# Altium PCB AGC test.PcbDoc
Units mm, origin at the board's own origin, x right, y up, seen from the top; angles counter-clockwise.
Board outline 60 x 60 mm, 4 copper layers (Top Layer, Layer 1, Layer 2, Bottom Layer), stack 1.501 mm thick; 51 components, 29 nets, 145 pads, 304 vias.
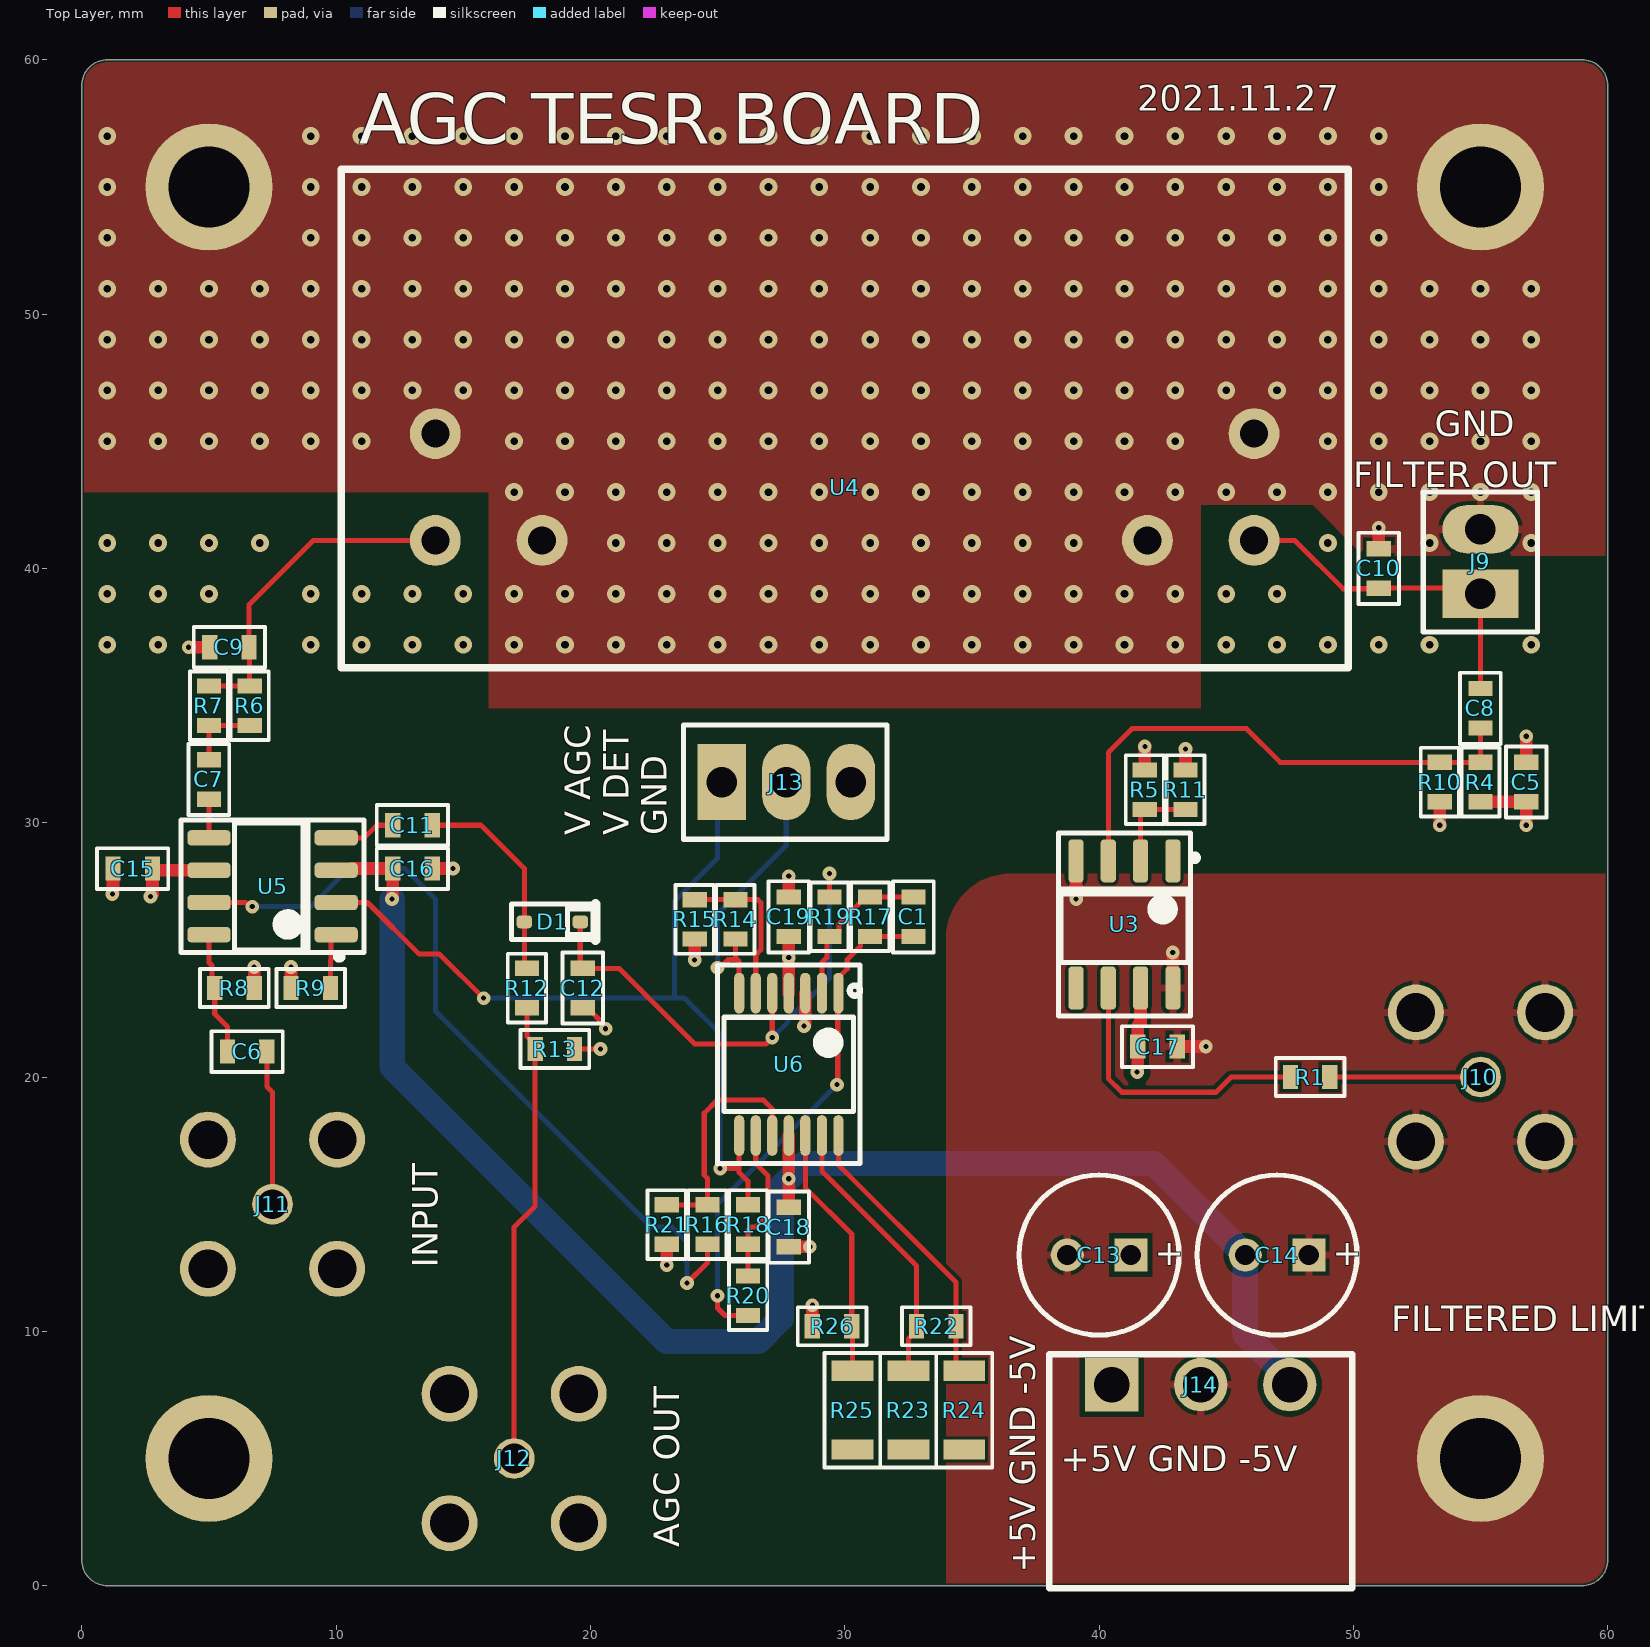
[diagram p0: Top Layer view]
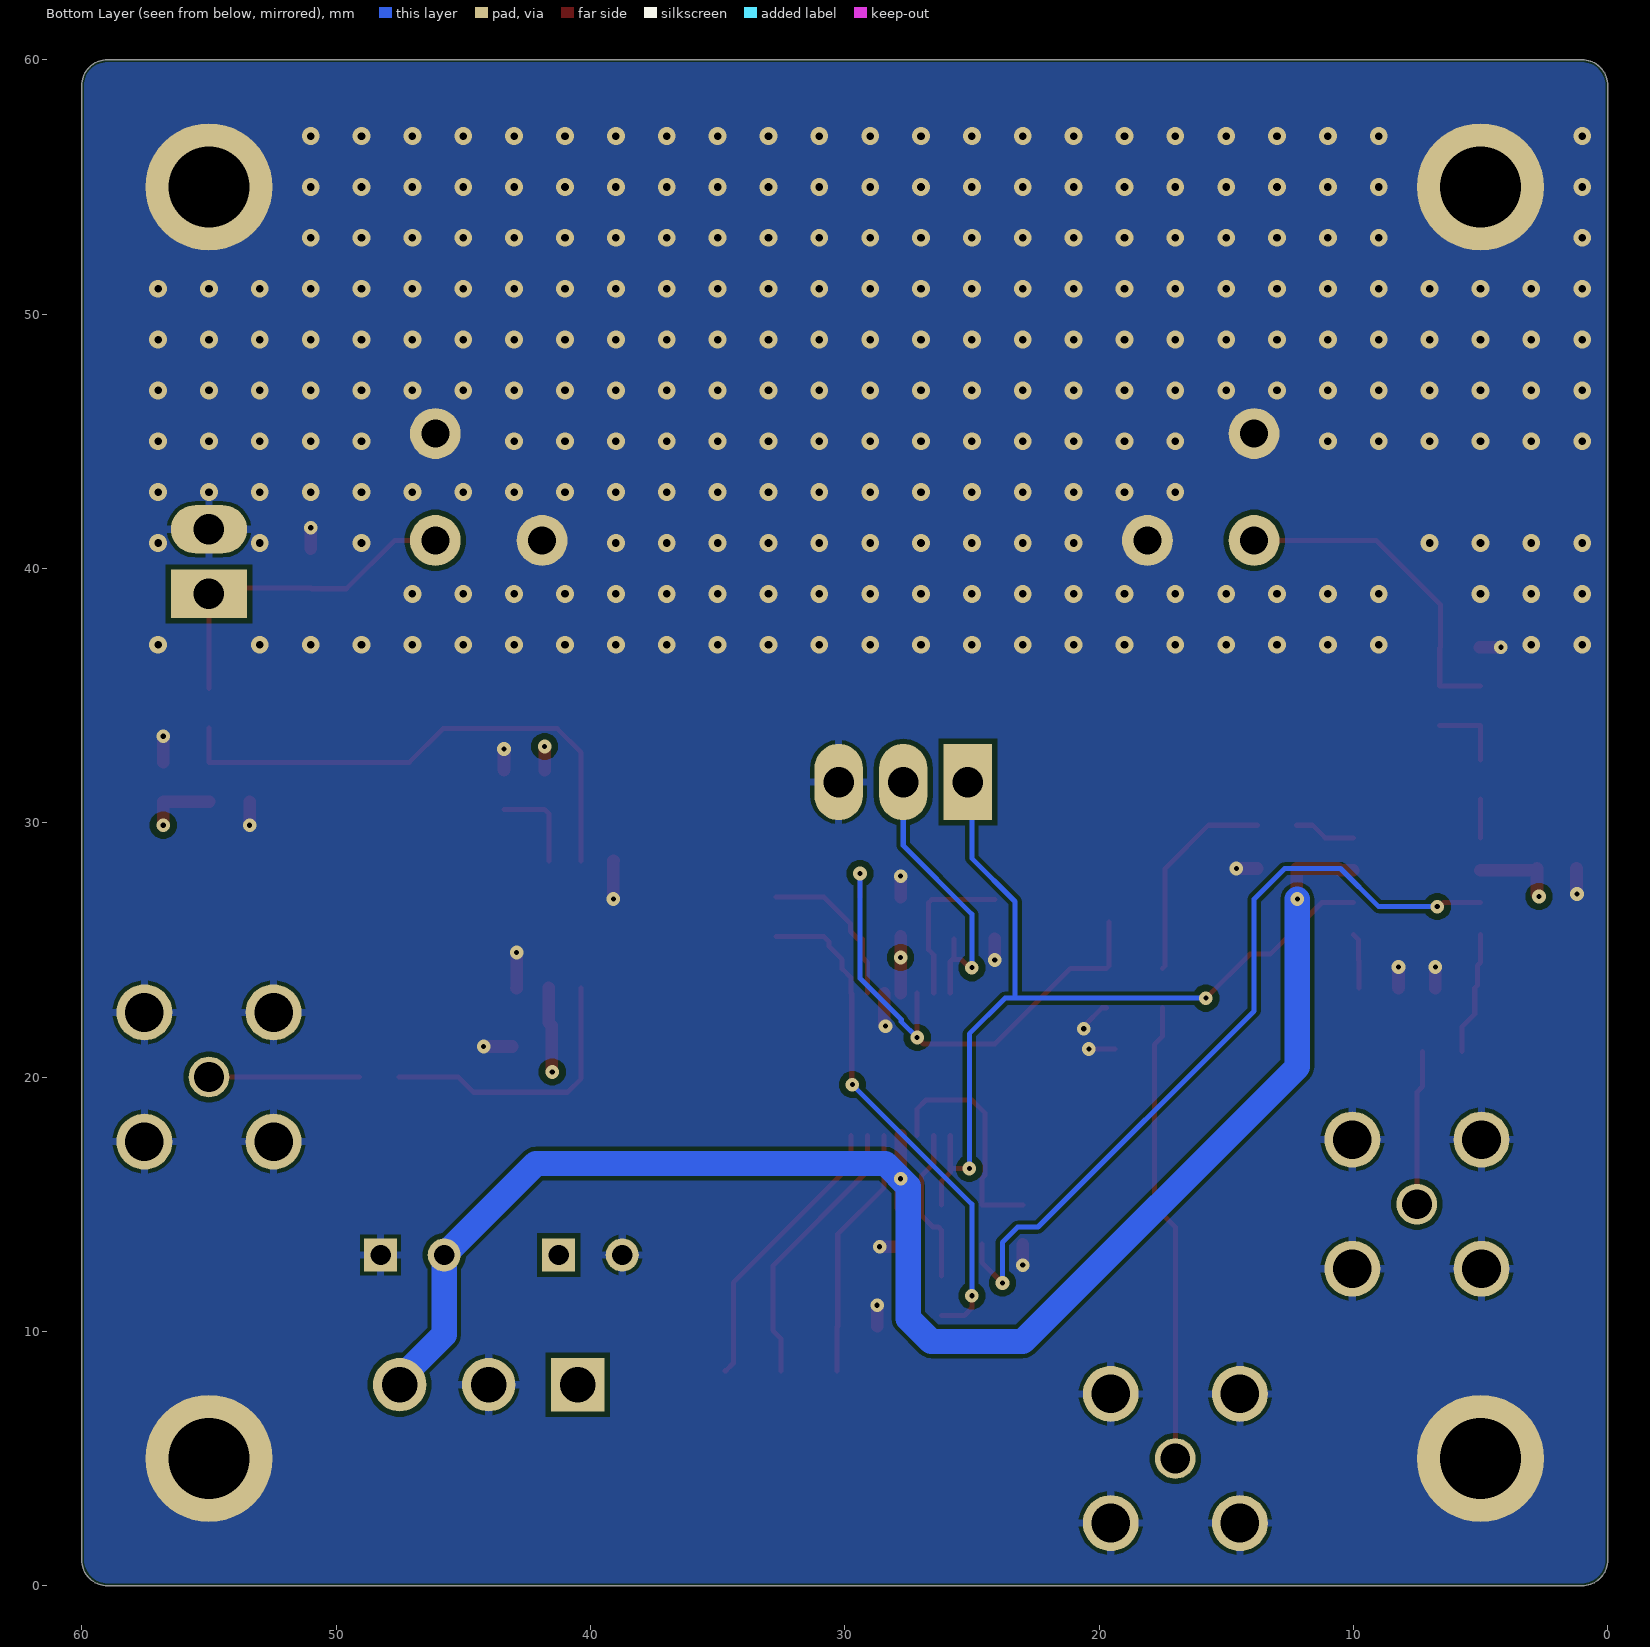
[diagram p1: Bottom Layer view, seen from below]
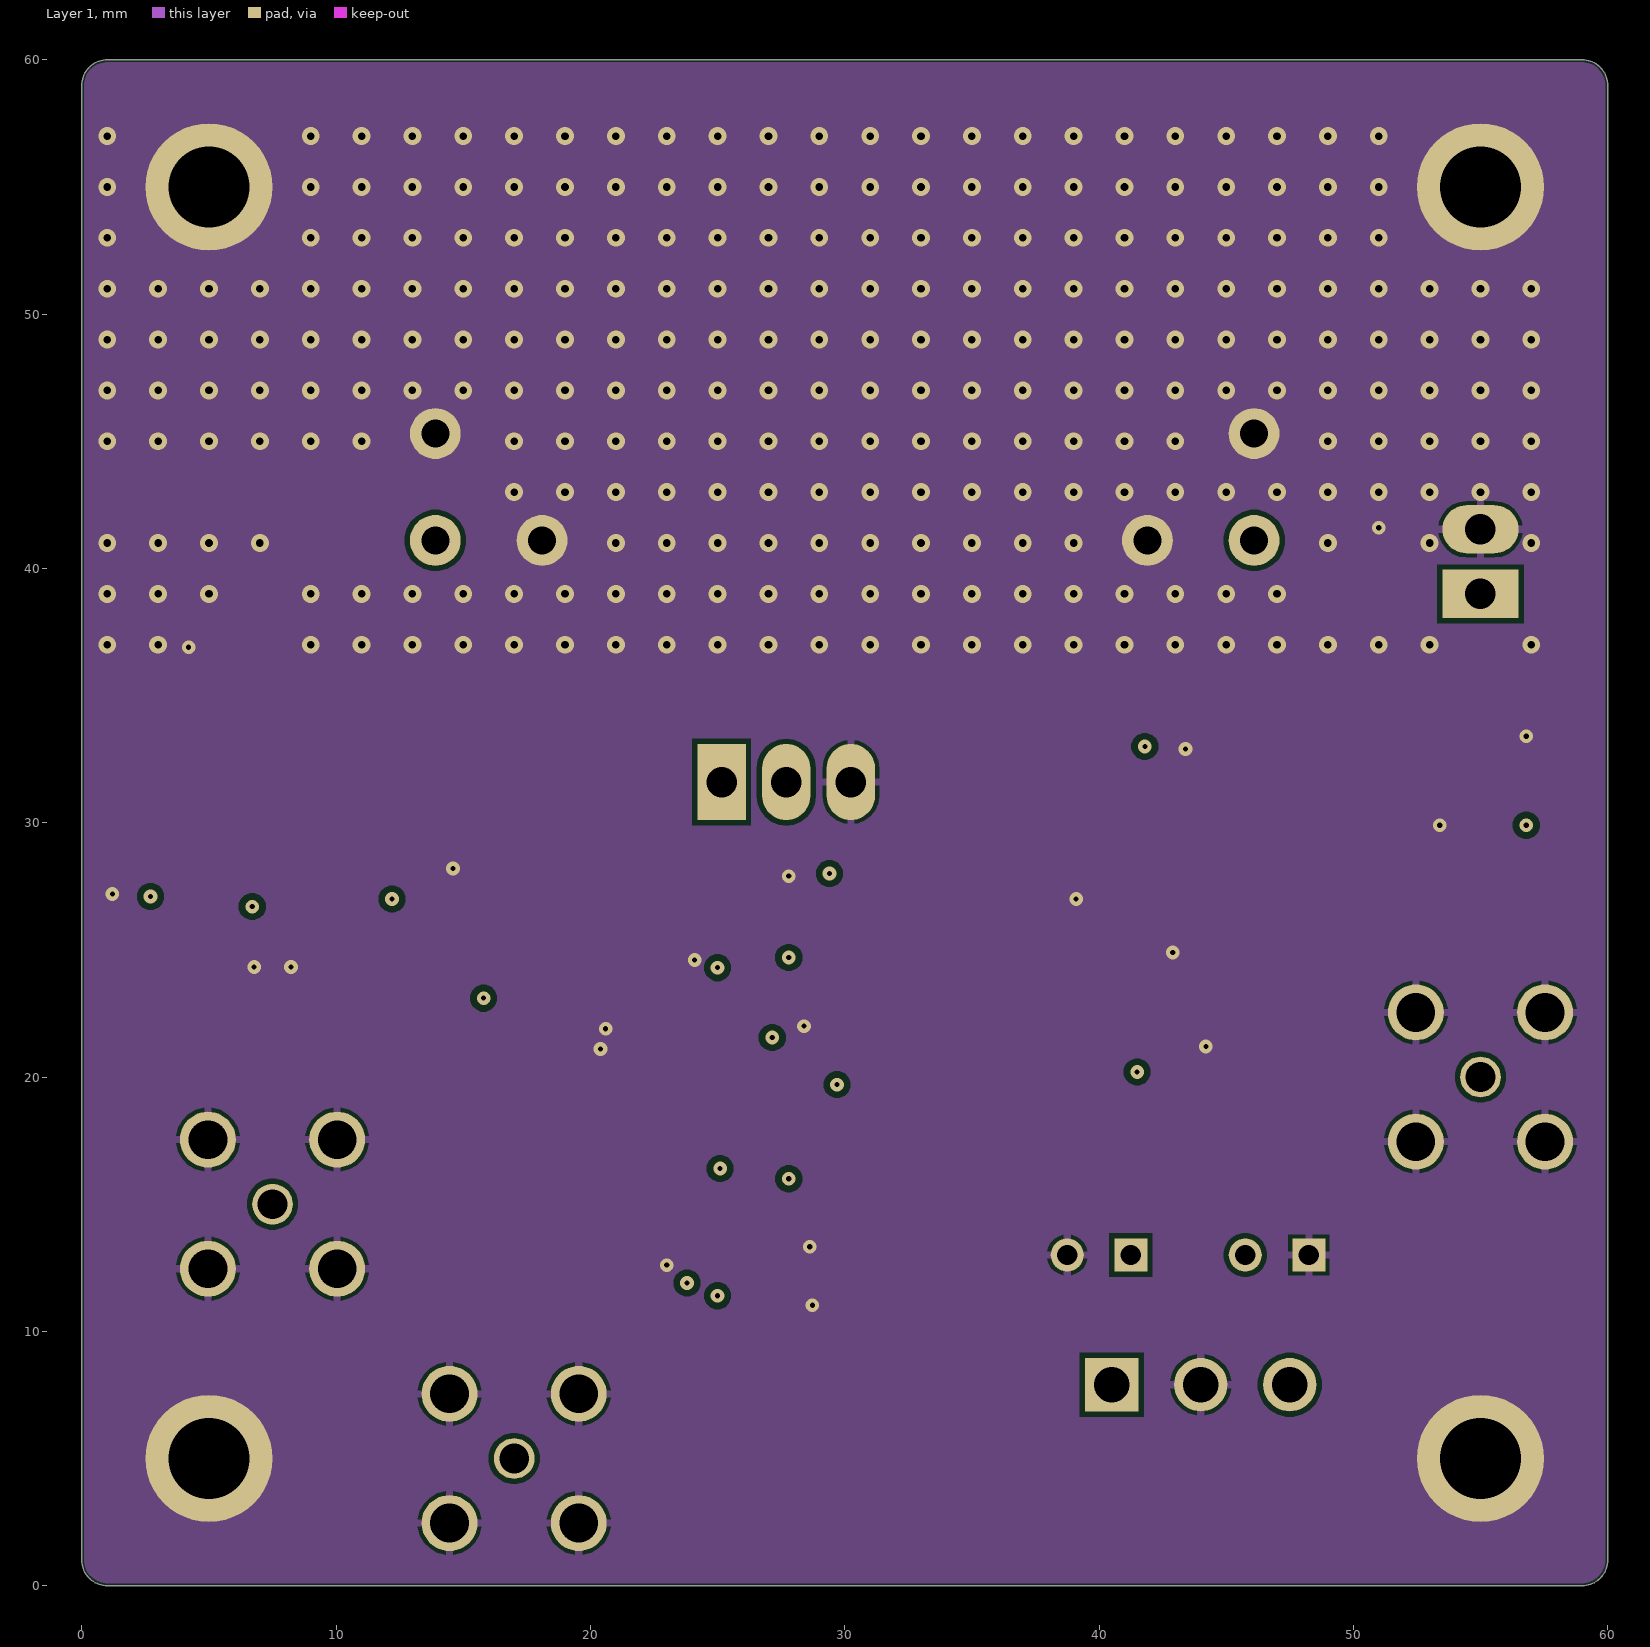
[diagram p2: Layer 1]
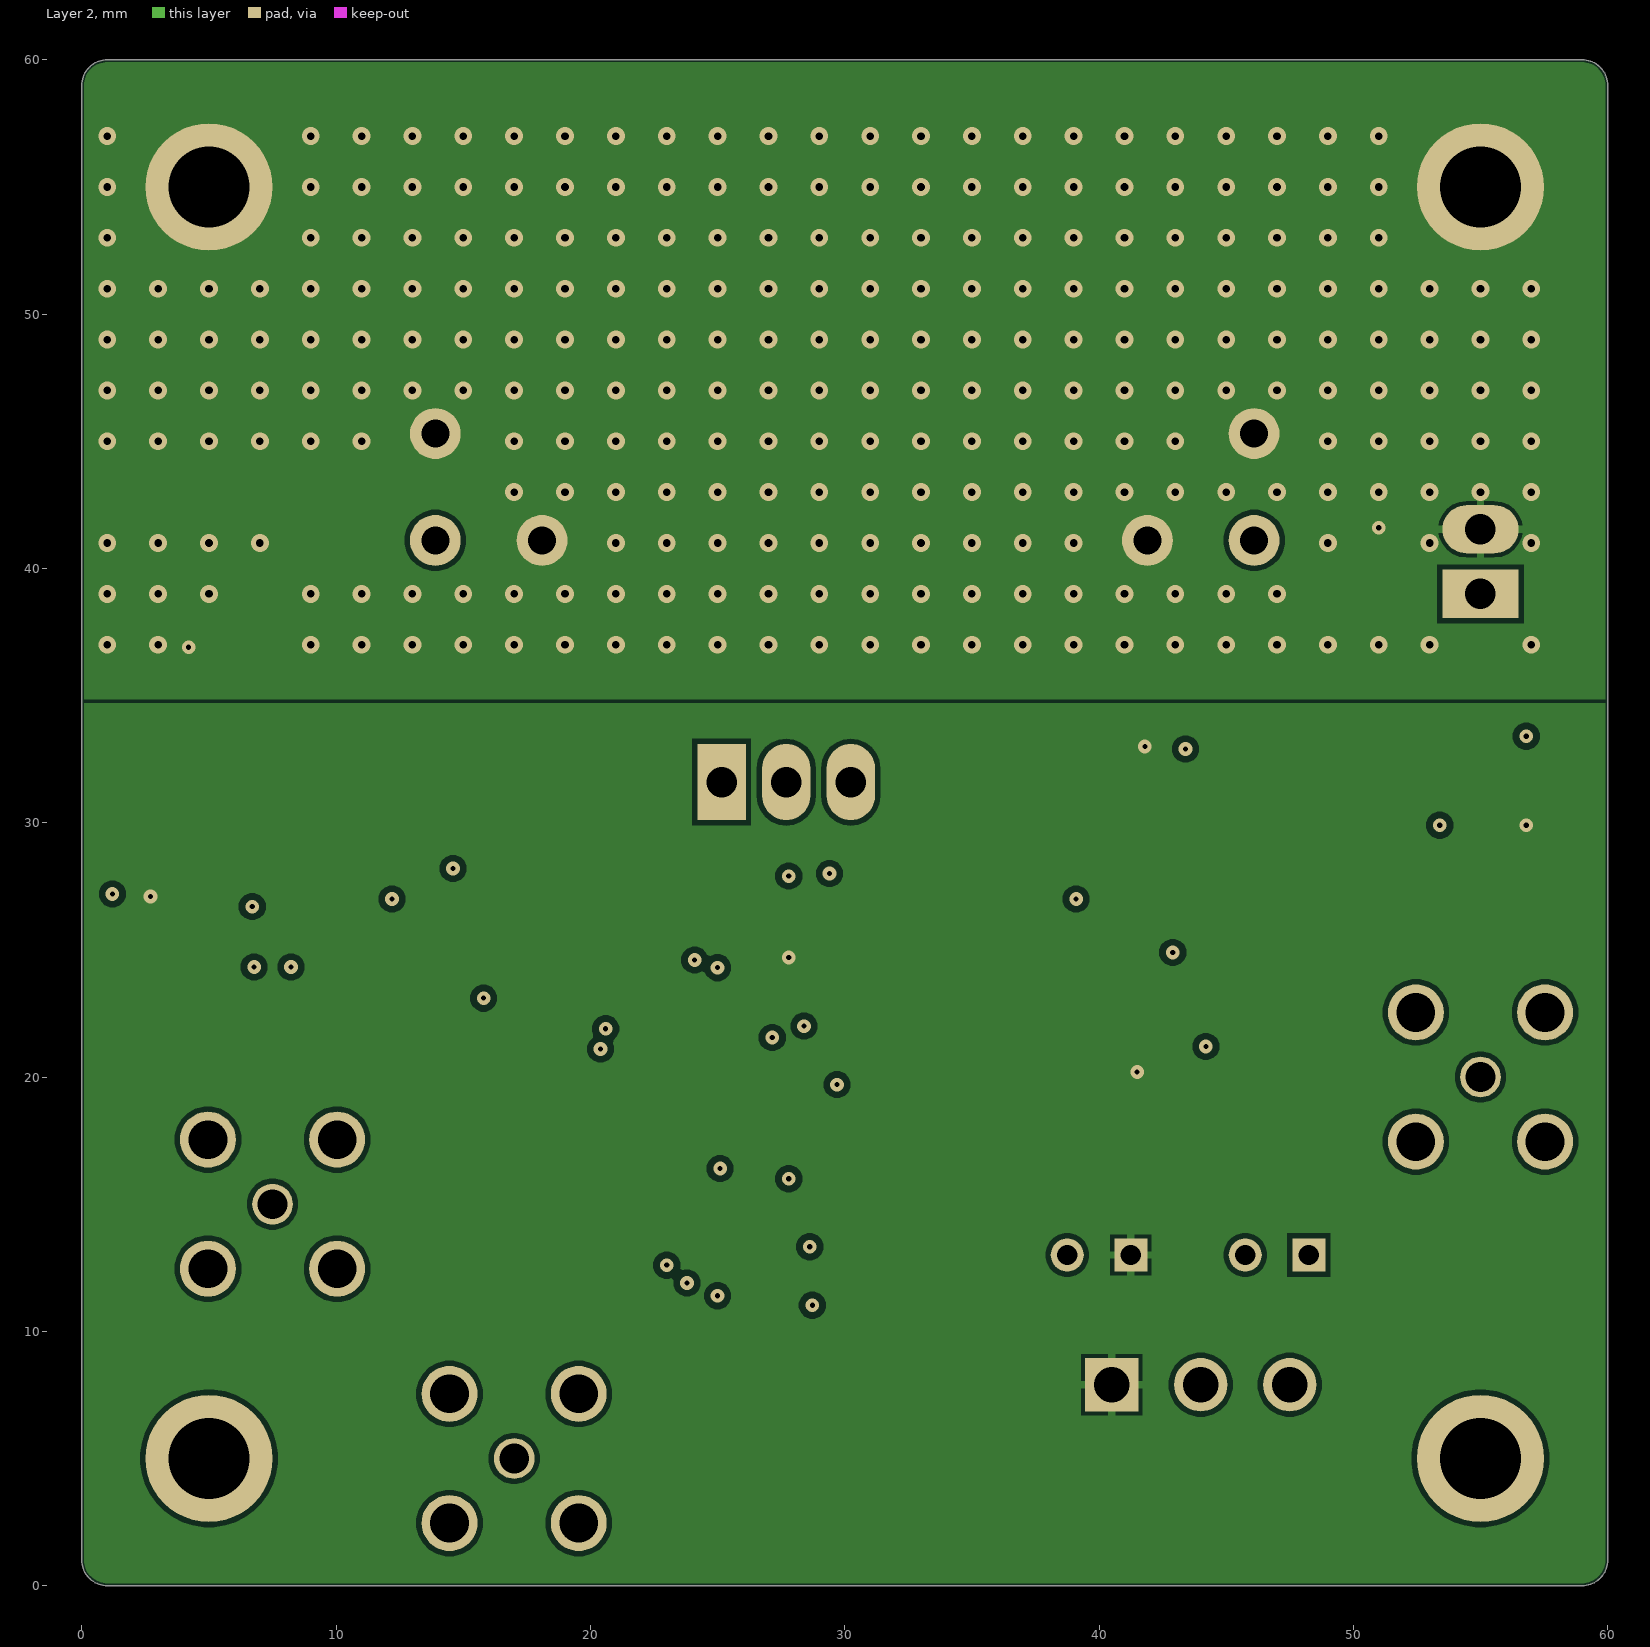
[diagram p3: Layer 2]
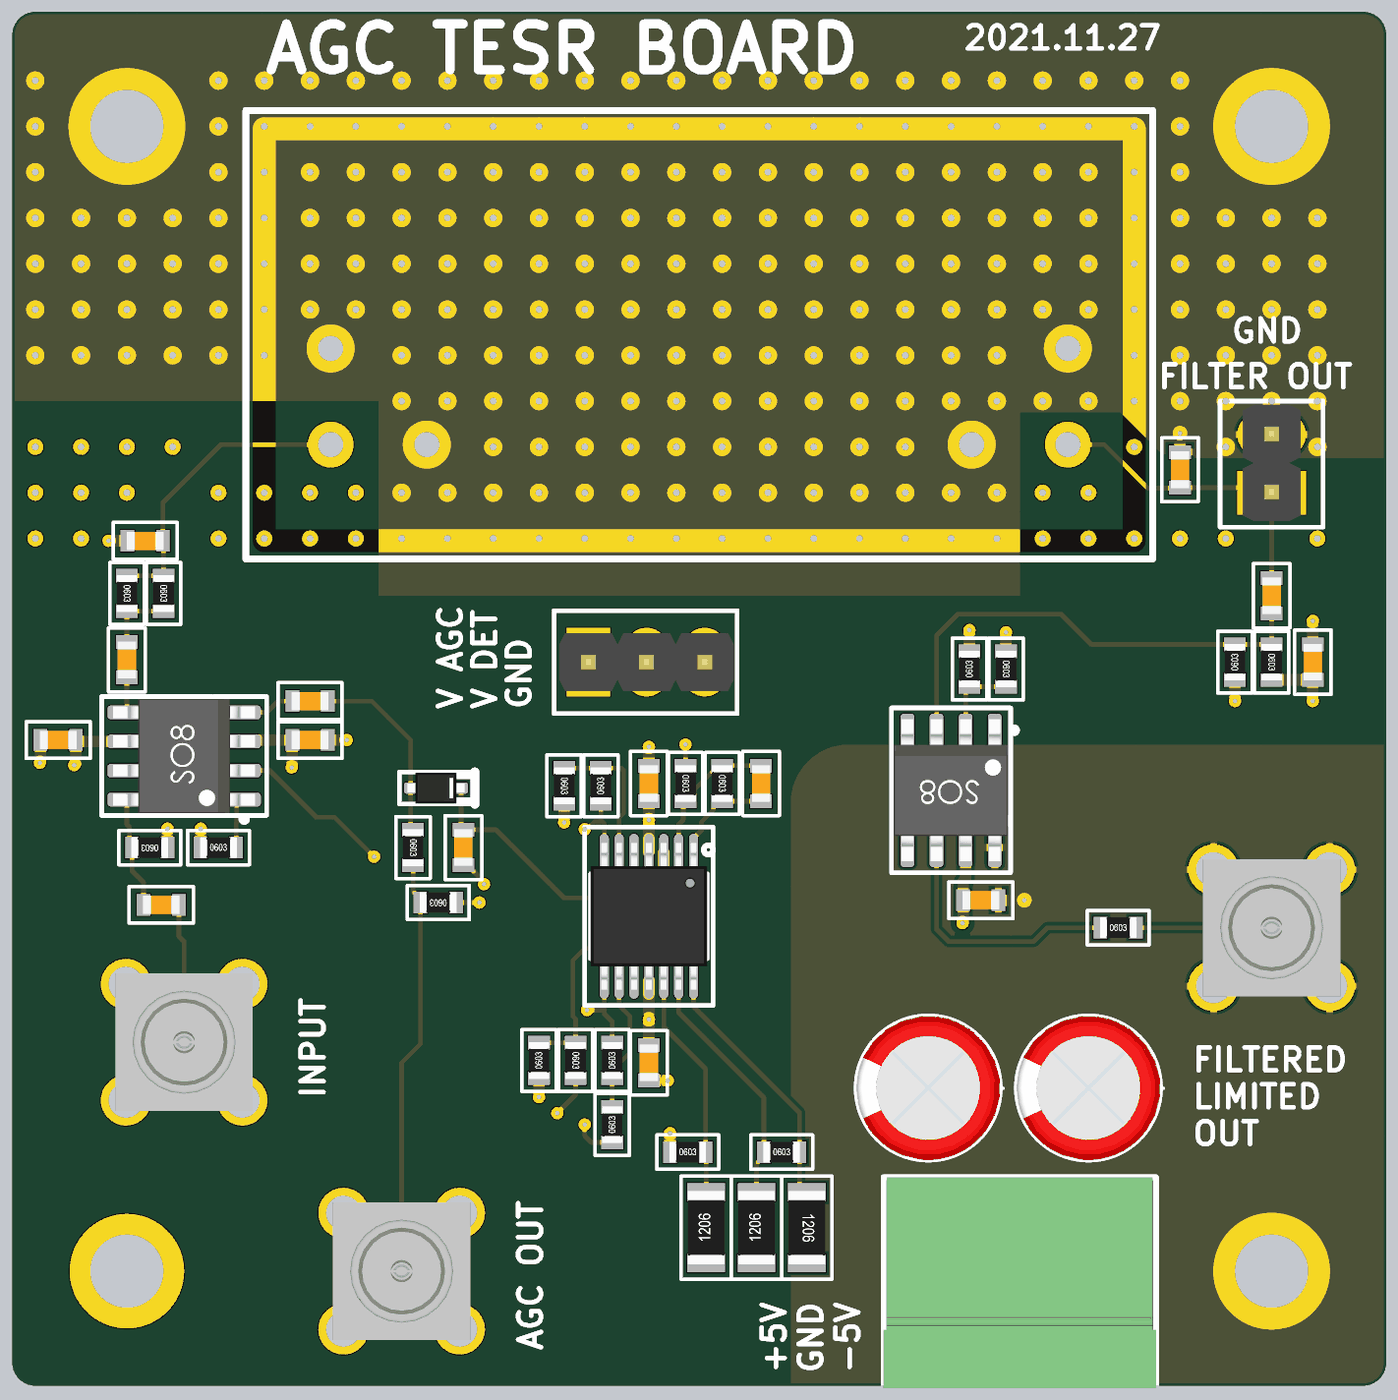
[diagram p4: 3D render of the assembled board from above, using the file's embedded part models]

## Layer stack, top to bottom
Top Solder: solder mask 0.0102, Solder Resist, Dk 3.5
Top Layer: signal copper 0.0356
Dielectric 2: prepreg 0.13, PP-006, Dk 4.1
Layer 1: signal copper 0.035
Dielectric 1: dielectric 1.1, FR-4, Dk 4.8
Layer 2: signal copper 0.035
Dielectric 3: prepreg 0.13, PP-006, Dk 4.1
Bottom Layer: signal copper 0.0356
Bottom Solder: solder mask 0.0102, Solder Resist, Dk 3.5

## Board outline
0,1 ccw(c1,1) 1,0 59,0 ccw(c59,1) 60,1 60,59 ccw(c59,59) 59,60 1,60 ccw(c1,59) 0,59

## Design rules (kind name [scope] priority, off if disabled: settings)
Clearance "Stitching GND" [IsStitchingVia and InNet('GND') vs (IsVia and (Not IsStitchingVia)) Or IsPad] p1: gap=0.127 ignorepadtopadclearanceinfootprint=FALSE
Clearance [All] p2: gap=0.15 ignorepadtopadclearanceinfootprint=FALSE except(0: Arc-Hole Track-Hole SMDPad-Hole THPad-Hole Via-Hole Fill-Hole Poly-Hole Region-Hole Text-Hole; 0.127: SMDPad-SMDPad SMDPad-Fill SMDPad-Poly SMDPad-Region; 0.152: Arc-Text Track-Text SMDPad-Text THPad-Text Via-Text Fill-Text Poly-Text Region-Text Text-Text; 0.2: Arc-SMDPad Arc-THPad Track-SMDPad Track-THPad SMDPad-THPad SMDPad-Via THPad-THPad THPad-Fill THPad-Poly THPad-Region; 0.254: Arc-Via Track-Via Via-Via Via-Fill Via-Poly Via-Region; 0.5: THPad-Via)
ComponentClearance [All] p1: gap=0.15 collisioncheckmode=3 verticalgap=0.254 showdistances=FALSE
HoleSize [All] p1: absolutevalues=TRUE maxlimit=6.3 minlimit=0.2 maxpercent=80.000 minpercent=20.000
HoleToHoleClearance [All] p1: gap=0.5 allowstackedmicrovias=TRUE
MinimumAnnularRing [All] p1: minimumring=0.13
MinimumSolderMaskSliver [All] p1: minsoldermaskwidth=0.2
PlaneConnect [All] p1: planeconnectstyle=Direct reliefexpansion=0.508 reliefentries=4 reliefconductorwidth=0.254 reliefairgap=0.254
PolygonConnect "Free pads to GND" [(ObjectKind = 'Pad') And (Component = 'Free') vs InNet('GND')] p1: connectstyle=Direct reliefconductorwidth=0.254 reliefentries=4 polygonreliefangle="90 Angle" airgapwidth=0.254
PolygonConnect "Footprint connection" [All vs HasFootprint('F-10M7-K6') or HasFootprint('32K243-40ML5 ro4003c') or HasFootprint('CONUFL001-SMD-T')] p2: connectstyle=Direct reliefconductorwidth=0.254 reliefentries=4 polygonreliefangle="90 Angle" airgapwidth=0.254
PolygonConnect "Via connection" [All vs IsVia or IsShieldingVia or IsStitchingVia] p3: connectstyle=Direct reliefconductorwidth=0.254 reliefentries=4 polygonreliefangle="90 Angle" airgapwidth=0.254
PolygonConnect [All] p4: connectstyle=Relief reliefconductorwidth=0.3 reliefentries=4 polygonreliefangle="90 Angle" airgapwidth=0.15
RoutingCorners [All] p1: cornerstyle=45-Degree minsetback=1 maxsetback=2.54
RoutingVias [All] p1: holewidth=0.3 width=0.6 viastyle="Through Hole" minholewidth=0.2 minwidth=0.4 maxholewidth=6 maxwidth=7
SilkToSilkClearance [All] p1: silktosilkclearance=0
SilkToSolderMaskClearance [IsPad] p1: minsilkscreentomaskgap=0.15 clearancetoexposedcopper=TRUE
SolderMaskExpansion SolderMaskExpansion_1 [IsVia] p1: expansion=-0.1 istentingtop=FALSE
SolderMaskExpansion [All] p2: expansion=0.05 istentingtop=FALSE
UnRoutedNet [All] p1: checkbadconnections=TRUE
Width [All] p1: maxlimit=3 minlimit=0.089 preferedwidth=0.2
21 further rules are at their usual default settings.

## Components (designator, comment, footprint, x,y, rotation, side; value= is the part's Value field where it differs from the comment)
C1 "1u, 25V, X7R" SMD0603 32.7,26.3 r90 top
C5 "1u, 25V, X7R" SMD0603 56.8,31.6 r270 top
C6 "10n, 50V, C0G" SMD0603 6.5,21 r180 top
C7 "10n, 50V, C0G" SMD0603 5,31.7 r90 top
C8 "10n, 50V, C0G" SMD0603 55,34.5 r270 top
C9 "22p, 50V, C0G" SMD0603 5.8,36.9 r0 top
C10 "22p, 50V, C0G" SMD0603 51,40 r270 top
C11 "10n, 50V, C0G" SMD0603 13,29.9 r0 top
C12 "100n, 25V, X7R" SMD0603 19.7,23.5 r90 top
C13 "100u, alu, 25V" WCAP-ATLI_6.3x11x2.5 40,13 r0 top
C14 "100u, alu, 25V" WCAP-ATLI_6.3x11x2.5 47,13 r0 top
C15 "1u, 25V, X7R" SMD0603 2,28.2 r0 top
C16 "1u, 25V, X7R" SMD0603 13,28.2 r180 top
C17 "1u, 25V, X7R" SMD0603 42.3,21.2 r180 top
C18 "1u, 25V, X7R" SMD0603 27.8,14.1 r90 top
C19 "1u, 25V, X7R" SMD0603 27.8,26.3 r270 top
D1 "BAT42WS-E3-08" SOD-323 18.5,26.1 r180 top
J9 "61300211121" "Header 2 2.54mm" 55,39 r180 top
J10 "MCX 73366-0061" 73366-0061 55,20 r0 top
J11 "MCX 73366-0061" 73366-0061 7.5,15 r0 top
J12 "MCX 73366-0061" 73366-0061 17,5 r0 top
J13 "61300311121" "Header 3 2.54mm" 25.16,31.6 r90 top
J14 "691322110003" 691322110003 44,4.5 r0 top
R1 "51R, 1%" "SMD0603 - R" 48.3,20 r0 top
R4 "1k8, 1%" "SMD0603 - R" 55,31.6 r270 top
R5 "1k8, 1%" "SMD0603 - R" 41.8,31.3 r90 top
R6 "1k8, 1%" "SMD0603 - R" 6.6,34.6 r270 top
R7 "1k8, 1%" "SMD0603 - R" 5,34.6 r270 top
R8 "51R, 1%" "SMD0603 - R" 6,23.5 r180 top
R9 "51R, 1%" "SMD0603 - R" 9,23.5 r0 top
R10 "1k8, 1%" "SMD0603 - R" 53.4,31.6 r90 top
R11 "1k8, 1%" "SMD0603 - R" 43.4,31.3 r270 top
R12 "1k8, 1%" "SMD0603 - R" 17.5,23.5 r270 top
R13 "200R, 1%" "SMD0603 - R" 18.6,21.1 r180 top
R14 "10k, 1%" "SMD0603 - R" 25.7,26.2 r90 top
R15 "10k, 1%" "SMD0603 - R" 24.1,26.2 r270 top
R16 "30k, 1%" "SMD0603 - R" 24.6,14.2 r270 top
R17 "4k7, 1%" "SMD0603 - R" 31,26.3 r270 top
R18 "10k, 1%" "SMD0603 - R" 26.2,14.2 r90 top
R19 "10k, 1%" "SMD0603 - R" 29.4,26.3 r270 top
R20 "10k, 1%" "SMD0603 - R" 26.2,11.4 r90 top
R21 "20k, 1%" "SMD0603 - R" 23,14.2 r90 top
R22 "4k7, 1%" "SMD0603 - R" 33.6,10.2 r0 top
R23 "1M, 1%" "SMD1206 - R" 32.5,6.9 r90 top
R24 "1M, 1%" "SMD1206 - R" 34.7,6.9 r270 top
R25 "1M, 1%" "SMD1206 - R" 30.3,6.9 r90 top
R26 "4k7, 1%" "SMD0603 - R" 29.5,10.2 r0 top
U3 "TLV3501AIDR" SOIC08 41,26 r270 top
U4 "F-10M7-K6" F-10M7-K6 30,41 r0 top
U5 "TL026CD" SOIC08 7.5,27.5 r180 top
U6 "LM324PWR" TSSOP14 27.8,20.5 r270 top

## Footprints (in the part's own frame and the unit in brackets; to place one, negate y for a bottom-side part, rotate by r counter-clockwise, add the part's x,y. Pads: shape width x height; smd on the part's side, far side on the other; paste and mask are expansions set on the pad)
73366-0061 [mm]
  round 1.6 hole 1.17: 1(0,0)
  round 2.2 hole 1.52: 2(-2.54,-2.54) 2(-2.54,2.54) 2(2.54,-2.54) 2(2.54,2.54)
  body extent -3,-3 3,3, height 5.5
691322110003 [mm] "Horizontal PCB Header, pitch 3.5mm, 03p"
  rect 2.1x2.1 hole 1.4: 1(-3.5,3.4)
  round 2.1 hole 1.4: 2(0,3.4) 3(3.5,3.4)
  silkscreen extent -5.95,-4.6 5.95,4.6, body extent -5.95,-4.6 5.95,4.6, height 7.3
F-10M7-K6 [mm]
  round 2 hole 1.1 mask+0.05: 1(-16.1,0.1) 2(-16.1,4.3) 3(-11.9,0.1) 4(11.9,0.1) 5(16.1,4.3) 6(16.1,0.1)
  silkscreen extent -19.8,-4.9 19.8,14.7, body extent -19,-4.1 19,13.9, height 12
"Header 2 2.54mm" [mm]
  rect 3x1.9 hole 1.2: 1(0,0)
  oval 3x1.9 hole 1.2: 2(0,-2.54)
  silkscreen extent -2.25,-4 2.25,1.5, body extent -1.27,-3.84 1.27,1.24, height 8.67
"Header 3 2.54mm" [mm]
  rect 3x1.9 hole 1.2: 1(0,0)
  oval 3x1.9 hole 1.2: 2(0,-2.54) 3(0,-5.08)
  silkscreen extent -2.25,-6.5 2.25,1.5, body extent -1.27,-6.35 1.27,1.27, height 8.47
SMD0603 [mm] "2-Leads, Body 1,60x0,85mm(0603), IPC Medium Density"
  rect 0.6x0.95 smd: 1(-0.775,0) 2(0.775,0)
  silkscreen extent -1.4,-0.8 1.4,0.8, body extent -0.8,-0.4 0.8,0.4, height 0.7
"SMD0603 - R" [mm] "2-Leads, Body 1,60x0,85mm(0603), IPC Medium Density"
  rect 0.6x0.95 smd: 1(-0.775,0) 2(0.775,0)
  silkscreen extent -1.35,-0.75 1.35,0.75, body extent -0.8,-0.45 0.8,0.45, height 0.5
"SMD1206 - R" [mm] "Chip Resistor, 2-Leads, Body 3,20x1,60mm(1206), IPC Medium Density"
  rect 0.8x1.65 smd: 1(-1.55,0) 2(1.55,0)
  silkscreen extent -2.25,-1.1 2.25,1.1, body extent -1.6,-0.8 1.6,0.8, height 0.6
SOD-323 [mm]
  rrect50% 0.6x0.5 smd: 1(-1.1,0) 2(1.1,0)
  silkscreen extent -1.7,-0.7 1.6,0.7, body extent -1.25,-0.67 1.25,0.68, height 1
SOIC08 [mm] "SOIC, 8-Leads, Body 4,90x3,90mm, Pitch 1,27mm, IPC Medium Density"
  rrect50% 1.7x0.6 smd: 1(-2.5,1.905) 2(-2.5,0.635) 3(-2.5,-0.635) 4(-2.5,-1.905) 5(2.5,-1.905) 6(2.5,-0.635) 7(2.5,0.635) 8(2.5,1.905)
  silkscreen extent -3.6,-2.6 3.6,2.88, body extent -3.1,-2.5 3.1,2.5, height 1.75
TSSOP14 [mm] "TSSOP, 14-Leads, Body 5,00x4,40mm, Pitch 0,65mm, IPC Medium Density"
  oval 1.6x0.4 smd: 1(-2.8,1.95) 2(-2.8,1.3) 3(-2.8,0.65) 4(-2.8,0) 5(-2.8,-0.65) 6(-2.8,-1.3) 7(-2.8,-1.95) 8(2.8,-1.95) 9(2.8,-1.3) 10(2.8,-0.65) 11(2.8,0) 12(2.8,0.65) 13(2.8,1.3) 14(2.8,1.95)
  silkscreen extent -3.9,-2.8 3.9,2.8, body extent -3.2,-2.55 3.2,2.55, height 1.2
WCAP-ATLI_6.3x11x2.5 [mm] "Aluminum Electrolytic Capacitors, 6.3x11mm"
  rect 1.3x1.3 hole 0.8: 1(1.25,0)
  round 1.3 hole 0.8: 2(-1.25,0)
  silkscreen extent -3.15,-3.15 3.15,3.15, body extent -3.14,-3.15 3.15,3.15, height 11.31

## Part data
C1 C5 C15 C16 C17 C18 C19: library part CGA3E1X7R1E105K080AC, "CAP CER 1UF 25V X7R 0603", Capacitance=1u, Manufacturer="TDK Corporation", Operating Temperature="-55°C ~ 125°C", Package / Case="0603 (1608 Metric)", Ratings=AEC-Q200, Supplier Part Number 1=810-CGA3E1X7R1E105K, Temperature Coefficient=X7R, Tolerance=±10%, Voltage - Rated=25V, Applications=Automotive, Category=Capacitors, ComponentLink1Description=https://product.tdk.com/info/en/catalog/datasheets/mlcc_automotive_general_en.pdf, ComponentLink1URL=https://product.tdk.com/info/en/catalog/datasheets/mlcc_automotive_general_en.pdf, Failure Rate=-, Features=-, Height - Seated (Max)=-, Lead Spacing=-, Lead Style=-, Manufacturer Part Number=CGA3E1X7R1E105K080AC, Mounting Type="Surface Mount, MLCC", Packaging="Cut Tape (CT)", Part Status=Active, Pricing 1="1=0.2, 10=0.135, 100=0.0686, 500=0.04696, 1000=0.04154 (USD)", RoHS="RoHS Compliant", Size / Dimension="0.063\" L x 0.032\" W (1.60mm x 0.80mm)", Stock 1=109509, Supplier 1=Mouser, Supplier 2=Farnell, Supplier 3=Digi-Key, Supplier Part Number 2=2346962, Supplier Part Number 3=445-6931-1-ND, Thickness (Max)="0.035\" (0.90mm)"
C6 C7 C8 C11: library part GRM1885C1H103JA01D, "Multilayer Ceramic Capacitors MLCC - SMD/SMT 0603 50VDC 10000pF 5% C0G", Capacitance=10n, Capacitance - nF="10 nF", Capacitance - pF="10000 pF", Case Code - in=0603, Case Code - mm=1608, Dielectric="C0G (NP0)", Manufacturer="Murata Electronics", Maximum Operating Temperature="+ 125 C", Minimum Operating Temperature="- 55 C", Package / Case="0603 (1608 metric)", Supplier Part Number 1=81-GRM1885C1H103JA1D, Tolerance="5 %", Voltage Rating DC="50 VDC", Brand="Murata Electronics", Category="Multilayer Ceramic Capacitors MLCC - SMD/SMT", Class="Class 1", CNHTS=8532241000, ComponentLink1Description=http://www.mouser.com/datasheet/2/281/murata_03052018_GRM_Series_1-1310166.pdf, ComponentLink1URL=http://www.mouser.com/datasheet/2/281/murata_03052018_GRM_Series_1-1310166.pdf, Height="0.8 mm", HTS Code=8532240020, Length="1.6 mm", Manufacturer Part Number=GRM1885C1H103JA01D, Minimum Order Quantity=1, Packaging="Cut Tape", Pricing 1="1=0.183, 10=0.129, 100=0.065, 500=0.045, 1000=0.039, 4000=0.030, 8000=0.027, 24000=0.025 (EUR)", Product="General Type MLCCs", Product Type="Ceramic Capacitors", Reeling=True, RoHS="RoHS Compliant", RoHS - Mouser=Y, Series=GRM, Standard Pack Qty=4000, Stock 1=217291, Subcategory=Capacitors, Supplier 1=Mouser, Supplier 2=Farnell, Supplier Part Number 2=2456107, TARIC=8532240000, Termination=Standard, Termination Style=SMD/SMT, Type="Chip Multilayer Ceramic Capacitor for General Purpose", Width="0.8 mm"
C9 C10: library part MC0603N220J500CT, "MULTICOMP - MC0603N220J500CT - CAP, MLCC, C0G/NP0, 22PF, 50V, 0603", Capacitance=22p, Manufacturer=MULTICOMP, Supplier Part Number 1=1759057, ComponentLink1Description=http://www.farnell.com/datasheets/1901289.pdf, ComponentLink1URL=http://www.farnell.com/datasheets/1901289.pdf, Manufacturer Part Number=MC0603N220J500CT, Pricing 1="10=0.0077, 100=0.0065, 500=0.0052, 1000=0.0044, 2000=0.0038 (GBP)", RoHS=YES, Stock 1=184439, Supplier 1=Farnell, Supplier 2=Newark, Supplier Part Number 2=94W8766
C12: library part 06033C104KAT2A, "AVX - 06033C104KAT2A - CAP, MLCC, X7R, 0.1UF, 25V, 0603", Capacitance=100n, Capacitance Tolerance="± 10%", Ceramic Capacitor Case="0603 [1608 Metric]", Dielectric Characteristic=X7, Manufacturer=AVX, Operating Temperature Max=125, Operating Temperature Min=-55, Supplier Part Number 1=2530141, Voltage Rating=25, Automotive Qualification Standard=-, ComponentLink1Description=http://www.farnell.com/datasheets/2237835.pdf, ComponentLink1URL=http://www.farnell.com/datasheets/2237835.pdf, Manufacturer Part Number=06033C104KAT2A, MSL="MSL 1 - Unlimited", Packaging="Cut Tape", Pricing 1="10=0.012, 100=0.0096, 500=0.0069, 1000=0.006, 2000=0.0048, 4000=0.0038, 20000=0.0027, 40000=0.0026 (GBP)", Product Range="AVX 0603 MLCC", RoHS=YES, Stock 1=22809, Supplier 1=Farnell, Supplier 2=Digi-Key, Supplier Part Number 2=478-3714-1-ND, SVHC="No SVHC (17-Dec-2015)<!--FANDB--><div class=\"features-and-benefits-container\"><div class=\"features-and-benefits-desc-container\"><span class=\"features-and-benefits-container-desc\">SMD Multilayer Ceramic Capacitor, 0603 [1608 Metric], 0.1 µF, 25 V, ± 10%, X7R, AVX 0603 MLCC</span></div><div class=\"features-and-benefits-description\"><span class=\"features-benefits-value\">The 06033C104KAT2A is a SMD Multilayer Ceramic Capacitor with Ni/Sn-plated termination, X7R dielectric and 0603 case. X7R formulations are called temperature stable ceramics and fall into EIA class II materials. X7R is the most popular of this intermediate dielectric constant material. This capacitance change is non-linear. Capacitance for X7R varies under the influence of electrical operating conditions such as voltage and frequency. X7"
C13 C14: library part 860010473007, "CAP 100 UF 20% 25 V", Capacitance=100uF, Case/Package=Radial, Manufacturer="Wurth Electronics", Max Operating Temperature=85°C, Min Operating Temperature=-40°C, Package Quantity=1500, Ripple Current=209mA, Supplier Part Number 1=710-860010473007, Tolerance=20%, Voltage Rating=25V, Category="Aluminum Electrolytic Capacitors", ComponentLink1Description=https://datasheet.ciiva.com/48693/001280151-da-01-en-wcap-atg8-alu-elec-caps-860010473007-48693591.pdf?src-supplier=Conrad, ComponentLink1URL=https://datasheet.ciiva.com/48693/001280151-da-01-en-wcap-atg8-alu-elec-caps-860010473007-48693591.pdf?src-supplier=Conrad, Diameter=6.3mm, Height=11mm, Height - Seated (Max)=0.492inch, Lead Pitch=0.098inch, Life (Hours)=2000Hour, Manufacturer Part Number=860010473007, Material=Aluminium, Mount="Through Hole", Packaging="Tape and Reel", Polarity=Polar, Pricing 1="1=0.14000, 10=0.13400, 25=0.13400, 50=0.11200, 100=0.09800, 250=0.08700 (USD)", REACH SVHC=Unknown, RoHS=Yes, Stock 1=1494, Supplier 1=Mouser, Supplier 2=Farnell, Supplier 3=Digi-Key, Supplier Part Number 2=2465675, Supplier Part Number 3=732-8630-1-ND, Voltage Rating (DC)=25V
D1: "DIODE SCHOTTKY 30V 200MA SOD323", Capacitance @ Vr, F="7pF @ 1V, 1MHz", Current - Average Rectified (Io)="200mA (DC)", Manufacturer="Vishay Semiconductor Diodes Division", Operating Temperature - Junction="125°C (Max)", Package / Case="SC-76, SOD-323", Supplier Device Package=SOD-323, Supplier Part Number 1=BAT42WS-E3-08-ND, Category="Discrete Semiconductor Products", ComponentLink1Description=http://www.vishay.com/docs/81813/bat42wsv.pdf, ComponentLink1URL=http://www.vishay.com/docs/81813/bat42wsv.pdf, Diode Type=Schottky, Manufacturer Part Number=BAT42WS-E3-08, Mounting Type="Surface Mount", Packaging="Tape & Reel (TR)", Part Status=Active, Pricing 1="15000=0.0504 (USD)", RoHS="RoHS Compliant", Speed="Small Signal =< 200mA (Io), Any Speed", Stock 1=0, Supplier 1=Digi-Key, Supplier 2=Mouser, Supplier Part Number 2=78-BAT42WS-E3-08
J9: "CONN HEADER 2 POS 2.54", Current Rating=3A, Insulation Color=Black, Manufacturer="Wurth Electronics Inc.", Material Flammability Rating="UL94 V-0", Operating Temperature="-40°C ~ 125°C", Supplier Part Number 1=710-61300211121, Voltage Rating=250V, Applications=-, Category="Connectors, Interconnects", ComponentLink1Description=https://katalog.we-online.de/em/datasheet/6130xx11121.pdf, ComponentLink1URL=https://katalog.we-online.de/em/datasheet/6130xx11121.pdf, Connector Type=Header, Contact Finish - Mating=Gold, Contact Finish - Post=-, Contact Finish Thickness - Mating=-, Contact Finish Thickness - Post=-, Contact Length - Mating="0.236\" (6.00mm)", Contact Length - Post="0.118\" (3.00mm)", Contact Material="Copper Alloy", Contact Shape=Square, Contact Type="Male Pin", Fastening Type=Push-Pull, Features=-, Ingress Protection=-, Insulation Height="0.100\" (2.54mm)", Insulation Material="Polybutylene Terephthalate (PBT)", Manufacturer Part Number=61300211121, Mated Stacking Heights=-, Mounting Type="Through Hole", Number of Positions=2, Number of Positions Loaded=All, Number of Rows=1, Overall Contact Length="0.454\" (11.54mm)", Packaging=Bulk, Part Status=Active, Pitch - Mating="0.100\" (2.54mm)", Pricing 1="1=0.13, 10=0.106, 25=0.088, 50=0.074, 100=0.067, 1000=0.061 (USD)", RoHS="RoHS Compliant", Row Spacing - Mating=-, Shrouding=Unshrouded, Stock 1=164911, Style="Board to Board or Cable", Supplier 1=Mouser, Supplier 2=Farnell, Supplier 3=Digi-Key, Supplier Part Number 2=2356153, Supplier Part Number 3=732-5315-ND, Termination=Solder
J10 J11 J12: library part 73366-0061, "CONN MCX JACK STR 50 OHM PCB", Dielectric Material="Polytetrafluoroethylene (PTFE)", Housing Color=Gold, Manufacturer="Molex, LLC", Manufacturer Part Number=0733660061, Operating Temperature="-55°C ~ 155°C", Supplier Part Number 1=538-73366-0061, Body Finish=Gold, Body Material=Brass, Cable Group=-, Category="Connectors, Interconnects", Center Contact Material="Beryllium Copper", Center Contact Plating=Gold, ComponentLink1Description=https://www.molex.com/pdm_docs/sd/733660061_sd.pdf, ComponentLink1URL=https://www.molex.com/pdm_docs/sd/733660061_sd.pdf, Connector Style=MCX, Connector Type="Jack, Female Socket", Contact Termination=Solder, Fastening Type=Snap-On, Features=-, Impedance="50 Ohm", Includes=-, Ingress Protection=-, Insertion Loss=-, Mating Cycles=500, Mounting Feature=-, Mounting Type="Through Hole", Packaging=Tray, Part Status=Active, Pricing 1="1=1.95, 10=1.765, 25=1.6572, 50=1.5854, 100=1.5133, 250=1.36916, 500=1.26106, 1000=1.0809, 2500=1.00884 (USD)", RoHS="RoHS Compliant", Shield Termination=Solder, Stock 1=39394, Supplier 1=Mouser, Supplier 2=Digi-Key, Supplier 3=Farnell, Supplier Part Number 2=WM5541-ND, Supplier Part Number 3=1909245
J13: "CONN HEADER 3 POS 2.54", Current Rating=3A, Insulation Color=Black, Manufacturer="Wurth Electronics Inc.", Material Flammability Rating="UL94 V-0", Operating Temperature="-40°C ~ 125°C", Supplier Part Number 1=710-61300311121, Voltage Rating=250V, Applications=-, Category="Connectors, Interconnects", ComponentLink1Description=https://katalog.we-online.de/em/datasheet/6130xx11121.pdf, ComponentLink1URL=https://katalog.we-online.de/em/datasheet/6130xx11121.pdf, Connector Type=Header, Contact Finish - Mating=Gold, Contact Finish - Post=-, Contact Finish Thickness - Mating=-, Contact Finish Thickness - Post=-, Contact Length - Mating="0.236\" (6.00mm)", Contact Length - Post="0.118\" (3.00mm)", Contact Material="Copper Alloy", Contact Shape=Square, Contact Type="Male Pin", Fastening Type=Push-Pull, Features=-, Ingress Protection=-, Insulation Height="0.100\" (2.54mm)", Insulation Material="Polybutylene Terephthalate (PBT)", Manufacturer Part Number=61300311121, Mated Stacking Heights=-, Mounting Type="Through Hole", Number of Positions=3, Number of Positions Loaded=All, Number of Rows=1, Overall Contact Length="0.454\" (11.54mm)", Packaging=Bulk, Part Status=Active, Pitch - Mating="0.100\" (2.54mm)", Pricing 1="1=0.13, 10=0.106, 25=0.088, 50=0.074, 100=0.067, 1000=0.061 (USD)", RoHS="RoHS Compliant", Row Spacing - Mating=-, Shrouding=Unshrouded, Stock 1=222317, Style="Board to Board or Cable", Supplier 1=Mouser, Supplier 2=Farnell, Supplier 3=Digi-Key, Supplier Part Number 2=2356154, Supplier Part Number 3=732-5316-ND, Termination=Solder
J14: "WR-TBL Serie 3221 - 3.50 mm Horizontal PCB Header, 03p", Supplier Part Number 1=732-2770-ND, ComponentLink1Description=Manufacturer, ComponentLink1URL=http://www.we-online.de, ComponentLink2Description=Datasheet, ComponentLink2URL=http://katalog.we-online.de/em/datasheet/6913221100xx.pdf, Part Number=691322110003, Pin Number=03p, Pitch="3.5 mm", Published Date="Jan 2017", Publisher="Wurth Elektronik", Supplier 1=Digi-Key, Supplier 2=Farnell, Supplier Part Number 2=1841316
R1 R8 R9: library part CRCW060351R0FKEA, "RES SMD 51 OHM 1% 1/10W 0603", Manufacturer="Vishay Dale", Operating Temperature="-55°C ~ 155°C", Package / Case="0603 (1608 Metric)", Power (Watts)="0.1W, 1/10W", Resistance=51R, Supplier Device Package=0603, Supplier Part Number 1=71-CRCW0603-51-E3, Temperature Coefficient=±100ppm/°C, Tolerance=±1%, Category=Resistors, ComponentLink1Description=http://www.vishay.com/docs/20035/dcrcwe3.pdf, ComponentLink1URL=http://www.vishay.com/docs/20035/dcrcwe3.pdf, Composition="Thick Film", Failure Rate=-, Features="Automotive AEC-Q200", Height - Seated (Max)="0.020\" (0.50mm)", Manufacturer Part Number=CRCW060351R0FKEA, Packaging="Cut Tape (CT)", Part Status=Active, Pricing 1="1=0.1, 10=0.042, 100=0.017, 1000=0.00764, 2500=0.00663 (USD)", RoHS="RoHS Compliant", Size / Dimension="0.063\" L x 0.033\" W (1.60mm x 0.85mm)", Stock 1=21691, Supplier 1=Mouser, Supplier 2=Farnell, Supplier 3=Digi-Key, Supplier Part Number 2=1652889, Supplier Part Number 3=541-51.0HCT-ND
R4 R5 R6 R7 R10 R11 R12: library part RC0603FR-071K8L, "Res Thick Film 0603 1.8K Ohm 1% 0.1W(1/10W) ±100ppm/C Molded SMD Paper T/R", Case Code (Imperial)=0603, Case Code (Metric)=1608, Manufacturer=Yageo, Max Operating Temperature=155°C, Max Power Dissipation=100mW, Min Operating Temperature=-55°C, Package Quantity=5000, Resistance=1k8, Supplier Part Number 1=603-RC0603FR-071K8L, Temperature Coefficient=100ppm/°C, Tolerance=1%, Voltage Rating=50V, Case/Package=0603, Category="Chip SMD Resistors", ComponentLink1Description=https://datasheet.ciiva.com/11808/0900766b80f96399-11808105.pdf?src-supplier=RSComponents, ComponentLink1URL=https://datasheet.ciiva.com/11808/0900766b80f96399-11808105.pdf?src-supplier=RSComponents, ComponentLink2Description=https://datasheet.ciiva.com/2519/pyu-r-int-thick-7-2519189.pdf?src-supplier=Digi-Key, ComponentLink2URL=https://datasheet.ciiva.com/2519/pyu-r-int-thick-7-2519189.pdf?src-supplier=Digi-Key, ComponentLink3Description=https://datasheet.ciiva.com/7746/443971-7746277.pdf?src-supplier=Element14, ComponentLink3URL=https://datasheet.ciiva.com/7746/443971-7746277.pdf?src-supplier=Element14, ComponentLink4Description=https://datasheet.ciiva.com/2519/pyu-r-int-thick-7-2519190.pdf?src-supplier=Digi-Key, ComponentLink4URL=https://datasheet.ciiva.com/2519/pyu-r-int-thick-7-2519190.pdf?src-supplier=Digi-Key, ComponentLink5Description=https://datasheet.ciiva.com/7746/443971-7746278.pdf?src-supplier=Element14, ComponentLink5URL=https://datasheet.ciiva.com/7746/443971-7746278.pdf?src-supplier=Element14, ComponentLink6Description=https://datasheet.ciiva.com/12558/rc0603-272842-12558694.pdf?src-supplier=Mouser, ComponentLink6URL=https://datasheet.ciiva.com/12558/rc0603-272842-12558694.pdf?src-supplier=Mouser, ComponentLink7Description=https://datasheet.ciiva.com/2519/pyu-r-int-thick-7-2519191.pdf?src-supplier=Digi-Key, ComponentLink7URL=https://datasheet.ciiva.com/2519/pyu-r-int-thick-7-2519191.pdf?src-supplier=Digi-Key, Composition="Thick Film", Depth=0.8mm, Features="Moisture Resistant", Height=0.45mm, Lead Free="Lead Free", Length=1.6mm, Manufacturer Part Number=RC0603FR-071K8L, Military Standard=Not, Number of Pins=2, Number of Terminations=2, Packaging="Tape and Reel", Power Rating=100mW, Pricing 1="1=0,10000, 10=0,01800, 100=0,00600, 1000=0,00500, 5000=0,00300, 10000=0,00300 (USD)", REACH SVHC="No SVHC", RoHS=Yes, Stock 1=505177, Supplier 1=Mouser, Supplier 2=Digi-Key, Supplier 3=Farnell, Supplier Part Number 2=311-1.80KHRCT-ND, Supplier Part Number 3=2693664, Termination=SMD/SMT, Voltage Rating (DC)=50V, Width=0.8mm
R13: library part RC0603FR-13200RL, "Res Thick Film 0603 200 Ohm 1% 0.1W(1/10W) ±100ppm/C Molded SMD Paper T/R", Case Code (Imperial)=0603, Case Code (Metric)=1608, Manufacturer=Yageo, Max Operating Temperature=155°C, Min Operating Temperature=-55°C, Power Rating=100mW, Resistance=200R, Resistor Type="Thick Film", Supplier Part Number 1=603-RC0603FR-13200RL, Temperature Coefficient=100ppm/°C, Tolerance=1%, Voltage Rating=50V, Case/Package=0603, Category="Chip SMD Resistors", ComponentLink1Description=https://datasheet.ciiva.com/12562/rc0603-272842-12562026.pdf?src-supplier=Mouser, ComponentLink1URL=https://datasheet.ciiva.com/12562/rc0603-272842-12562026.pdf?src-supplier=Mouser, Construction=Rectangular, Contact Plating=Tin,Matte, Depth=0.8mm, Height=0.45mm, Length=1.6mm, Manufacturer Part Number=RC0603FR-13200RL, Military Standard=Not, Packaging="Tape and Reel", Pricing 1="1=0,10000, 10=0,01800, 50=0,01800, 100=0,00600, 1000=0,00500, 10000=0,00400 (USD)", Radiation Hardening=No, RoHS=Yes, RoHS Compliant=Yes, Series=RC, Stock 1=45325, Supplier 1=Mouser, Supplier 2="Arrow Electronics", Supplier Part Number 2=RC0603FR-13200RL, Termination=SMD/SMT, Width=0.8mm
R14 R15 R18 R19 R20: library part RC0603FR-0710KL, "YAGEO (PHYCOMP) - RC0603FR-0710KL - RES, THICK FILM, 10K, 1%, 0.1W, 0603", Manufacturer="YAGEO (PHYCOMP)", Power Rating=100, Resistance=10k, Resistance Tolerance="± 1%", Resistor Case Style="0603 [1608 Metric]", Resistor Element Material="Thick Film", Supplier Part Number 1=603-RC0603FR-0710KL, Temperature Coefficient="± 100", Voltage Rating=50, Automotive Qualification Standard=-, ComponentLink1Description=http://past.yageo.com/pdf/PYu-R_Packing_6.pdf, ComponentLink1URL=http://past.yageo.com/pdf/PYu-R_Packing_6.pdf, ComponentLink2Description=http://www.farnell.com/datasheets/2167052.pdf, ComponentLink2URL=http://www.farnell.com/datasheets/2167052.pdf, Manufacturer Part Number=RC0603FR-0710KL, MSL="MSL 1 - Unlimited<!--FANDB--><div class=\"features-and-benefits-container\"><div class=\"features-and-benefits-desc-container\"><span class=\"features-and-benefits-container-desc\">SMD Chip Resistor, Thick Film, 10 kohm, 50 V, 0603 [1608 Metric], 100 mW, ± 1", Packaging="Tape & Reel", Pricing 1="5000=0.0025, 25000=0.0014, 50000=0.0013 (GBP)", Product Range="RC Series", RoHS=YES, Stock 1=9995, Supplier 1=Mouser, Supplier 2=Farnell, Supplier 3=Digi-Key, Supplier Part Number 2=2421850, Supplier Part Number 3=311-10.0KHRCT-ND, SVHC="No SVHC (20-Jun-2016)"
R16: library part RC0603FR-0730KL, "YAGEO - RC0603FR-0730KL - RES, THICK FILM, 30K, 1%, 0.1W, 0603, REEL", Case Code (Imperial)=0603, Case Code (Metric)=1608, Manufacturer=Yageo, Max Operating Temperature=155°C, Max Power Dissipation=100mW, Min Operating Temperature=-55°C, Package Quantity=5000, Resistance=30k, Resistance Tolerance=1%, Resistor Type="Thick Film", Supplier Part Number 1=603-RC0603FR-0730KL, Temperature Coefficient=100ppm/°C, Voltage Rating=50V, Case/Package=0603, Category="Chip SMD Resistors", ComponentLink1Description=https://datasheet.ciiva.com/12558/rc0603-272842-12558744.pdf?src-supplier=Mouser, ComponentLink1URL=https://datasheet.ciiva.com/12558/rc0603-272842-12558744.pdf?src-supplier=Mouser, ComponentLink2Description=https://datasheet.ciiva.com/46395/443971-46395003.pdf?src-supplier=Element14, ComponentLink2URL=https://datasheet.ciiva.com/46395/443971-46395003.pdf?src-supplier=Element14, Construction=Rectangular, Depth=0.8mm, Features="Moisture Resistant", Height=0.45mm, Lead Free="Lead Free", Length=1.6mm, Manufacturer Part Number=RC0603FR-0730KL, Military Standard=Not, Number of Pins=2, Number of Terminations=2, Packaging="Tape and Reel", Power Rating=100mW, Pricing 1="1=0.10000, 10=0.01800, 50=0.01800, 100=0.00600, 1000=0.00500, 10000=0.00300 (USD)", REACH SVHC=Unknown, RoHS=Yes, RoHS Compliant=Yes, Series=RC, Size Code=0603, Stock 1=345417, Supplier 1=Mouser, Supplier 2=Farnell, Supplier 3=Digi-Key, Supplier Part Number 2=3495811, Supplier Part Number 3=311-30.0KHRCT-ND, Termination=SMD/SMT, Tolerance=1%, Voltage Rating (DC)=50V, Width=0.8mm
R17 R22 R26: library part AC0603FR-074K7L, "RES SMD 4.7K OHM 1% 1/10W 0603", Manufacturer=Yageo, Operating Temperature="-55°C ~ 155°C", Package / Case="0603 (1608 Metric)", Power (Watts)="0.1W, 1/10W", Resistance=4k7, Supplier Device Package=0603, Supplier Part Number 1=603-AC0603FR-074K7L, Temperature Coefficient=±100ppm/°C, Tolerance=±1%, Category=Resistors, ComponentLink1Description=http://www.yageo.com/NewPortal/yageodocoutput?fileName=/pdf/R-Chip/PYu-AC_51_RoHS_L_6.pdf, ComponentLink1URL=http://www.yageo.com/NewPortal/yageodocoutput?fileName=/pdf/R-Chip/PYu-AC_51_RoHS_L_6.pdf, Composition="Thick Film", Failure Rate=-, Features="Automotive AEC-Q200, Moisture Resistant", Height - Seated (Max)="0.022\" (0.55mm)", Manufacturer Part Number=AC0603FR-074K7L, Packaging="Cut Tape (CT)", Part Status=Active, Pricing 1="1=0.1, 10=0.025, 100=0.01, 1000=0.00448, 2500=0.00389 (USD)", RoHS="RoHS Compliant", Size / Dimension="0.063\" L x 0.032\" W (1.60mm x 0.80mm)", Stock 1=391581, Supplier 1=Mouser, Supplier 2=Digi-Key, Supplier 3="Future Electronics", Supplier Part Number 2=YAG3613CT-ND, Supplier Part Number 3=AC0603FR-074K7L-CUTT
R21: library part AC0603FR-0720KL, "RES SMD 20K OHM 1% 1/10W 0603", Manufacturer=Yageo, Operating Temperature="-55°C ~ 155°C", Package / Case="0603 (1608 Metric)", Power (Watts)="0.1W, 1/10W", Resistance=20k, Supplier Device Package=0603, Supplier Part Number 1=603-AC0603FR-0720KL, Temperature Coefficient=±100ppm/°C, Tolerance=±1%, Category=Resistors, ComponentLink1Description=http://www.yageo.com/NewPortal/yageodocoutput?fileName=/pdf/R-Chip/PYu-AC_51_RoHS_L_6.pdf, ComponentLink1URL=http://www.yageo.com/NewPortal/yageodocoutput?fileName=/pdf/R-Chip/PYu-AC_51_RoHS_L_6.pdf, Composition="Thick Film", Failure Rate=-, Features="Automotive AEC-Q200, Moisture Resistant", Height - Seated (Max)="0.022\" (0.55mm)", Manufacturer Part Number=AC0603FR-0720KL, Packaging="Cut Tape (CT)", Part Status=Active, Pricing 1="1=0.1, 10=0.025, 100=0.01, 1000=0.00448, 2500=0.00389 (USD)", RoHS="RoHS Compliant", Size / Dimension="0.063\" L x 0.032\" W (1.60mm x 0.80mm)", Stock 1=120000, Supplier 1=Mouser, Supplier 2=Digi-Key, Supplier Part Number 2=YAG3577CT-ND
R23 R24 R25: library part ERJ-8ENF1004V, "RES SMD 1M OHM 1% 1/4W 1206", Manufacturer="Panasonic Electronic Components", Operating Temperature="-55°C ~ 155°C", Package / Case="1206 (3216 Metric)", Power (Watts)="0.25W, 1/4W", Resistance=1M, Supplier Device Package=1206, Supplier Part Number 1=667-ERJ-8ENF1004V, Temperature Coefficient=±100ppm/°C, Tolerance=±1%, Category=Resistors, ComponentLink1Description=https://industrial.panasonic.com/cdbs/www-data/pdf/RDA0000/AOA0000C304.pdf, ComponentLink1URL=https://industrial.panasonic.com/cdbs/www-data/pdf/RDA0000/AOA0000C304.pdf, Composition="Thick Film", Failure Rate=-, Features="Automotive AEC-Q200", Height - Seated (Max)="0.028\" (0.70mm)", Manufacturer Part Number=ERJ-8ENF1004V, Packaging="Cut Tape (CT)", Part Status=Active, Pricing 1="1=0.11, 10=0.097, 100=0.0373, 1000=0.01641, 2500=0.01417 (USD)", RoHS="RoHS Compliant", Size / Dimension="0.126\" L x 0.063\" W (3.20mm x 1.60mm)", Stock 1=216046, Supplier 1=Mouser, Supplier 2=Farnell, Supplier 3=Digi-Key, Supplier Part Number 2=2307298, Supplier Part Number 3=P1.00MFCT-ND
U3: "Rail-to-Rail, High-Speed Comparator in Microsize Packages", Case/Package=SOIC, Input Bias Current=10pA, Input Offset Voltage (Vos)=6.5mV, Manufacturer="Texas Instruments", Max Operating Temperature=125°C, Max Supply Current=5mA, Max Supply Voltage=5.5V, Min Operating Temperature=-40°C, Min Supply Voltage=2.7V, Output Current=74mA, Package Quantity=2500, Power Supply Rejection Ratio (PSRR)=100dB, Supplier Part Number 1=595-TLV3501AIDR, Category="Amplifiers - Op Amps, Buffer, Instrumentation", Common Mode Rejection Ratio=70dB, ComponentLink1Description=https://datasheet.ciiva.com/1830/tlv3501-1830016.pdf?src-supplier=Digi-Key, ComponentLink1URL=https://datasheet.ciiva.com/1830/tlv3501-1830016.pdf?src-supplier=Digi-Key, ComponentLink2Description=https://datasheet.ciiva.com/14392/tlv3501-14392108.pdf?src-supplier=Avnet, ComponentLink2URL=https://datasheet.ciiva.com/14392/tlv3501-14392108.pdf?src-supplier=Avnet, Hysteresis=6mV, Lead Free="Lead Free", Manufacturer Part Number=TLV3501AIDR, Max Input Current=10pA, Mount="Surface Mount", Nominal Supply Current=5mA, Number of Channels=1, Number of Elements=1, Number of Pins=8, Output Type=TTL,PUSH-PULL, Packaging="Tape and Reel", Pricing 1="1=3.15000, 10=2.83000, 50=2.68000, 100=2.32000, 1000=1.73000, 10000=1.72000 (USD)", Propagation Delay=10ns, Quiescent Current=5mA, Radiation Hardening=No, Response Time=0.0045us, RoHS=Yes, RoHS Compliant=Yes, Series=-, Stock 1=2140, Supplier 1=Mouser, Supplier 2=Digi-Key, Supplier 3="Arrow Electronics", Supplier Part Number 2=296-43611-1-ND, Supplier Part Number 3=TLV3501AIDR, Supply Current=5mA, Technology=CMOS, Type="General Purpose", Weight=0.002677oz
U4: "10.7 MHz crystal band-pass filter, 8 poles / - Bandwidth (-3dB): 12 KHz / - Selectivity: 90 dB / - Impedance: 900 Ω / - Dimensions: 38 x 18 mm, h 12 mm"
U5: "Differential High-Frequency Amplifier with AGC 8-SOIC 0 to 70", Case/Package=D, Dual Supply Voltage=6V, Input Bias Current=30uA, Manufacturer="Texas Instruments", Max Dual Supply Voltage=8V, Max Operating Temperature=70°C, Max Power Dissipation=725mW, Min Dual Supply Voltage=3V, Min Operating Temperature=0°C, Nominal Supply Current=27mA, Operating Supply Current=22mA, Operating Supply Voltage=16V, Output Current Per Channel=4mA, Package Quantity=75, Supplier Part Number 1=595-TL026CD, Voltage Gain=38.59dB, -3db Bandwidth=50MHz, Bandwidth=50MHz, Category="Amplifiers - Op Amps, Buffer, Instrumentation", Common Mode Rejection Ratio=60dB, ComponentLink1Description=https://datasheet.ciiva.com/26857/tl026cd-26857756.pdf?src-supplier=IIIC, ComponentLink1URL=https://datasheet.ciiva.com/26857/tl026cd-26857756.pdf?src-supplier=IIIC, ComponentLink2Description=https://datasheet.ciiva.com/28430/slfs007a-28430037.pdf?src-supplier=Avnet+Europe, ComponentLink2URL=https://datasheet.ciiva.com/28430/slfs007a-28430037.pdf?src-supplier=Avnet+Europe, ComponentLink3Description=https://datasheet.ciiva.com/26815/getdatasheetpartid-48553-26815191.pdf?src-supplier=Verical, ComponentLink3URL=https://datasheet.ciiva.com/26815/getdatasheetpartid-48553-26815191.pdf?src-supplier=Verical, ComponentLink4Description=https://datasheet.ciiva.com/1488/1835114-1488075.pdf?src-supplier=Element14, ComponentLink4URL=https://datasheet.ciiva.com/1488/1835114-1488075.pdf?src-supplier=Element14, ComponentLink5Description=https://datasheet.ciiva.com/1824/tl026-1824398.pdf?src-supplier=Digi-Key, ComponentLink5URL=https://datasheet.ciiva.com/1824/tl026-1824398.pdf?src-supplier=Digi-Key, ComponentLink6Description=https://datasheet.ciiva.com/48712/001011461-da-01-en-agc-video-amplifier-tl026cd-soic-8-tid-48712348.pdf?src-supplier=Conrad, ComponentLink6URL=https://datasheet.ciiva.com/48712/001011461-da-01-en-agc-video-amplifier-tl026cd-soic-8-tid-48712348.pdf?src-supplier=Conrad, Height=1.58mm, Lead Free="Lead Free", Length=4.9mm, Manufacturer Part Number=TL026CD, Max Supply Voltage=8V, Min Supply Voltage=3V, Number of Amplifiers=1, Number of Channels=1, Number of Circuits=1, Number of Elements=1, Number of Pins=8, Packaging=Rail/Tube, Power Dissipation=725mW, Pricing 1="1=2.57000, 10=2.46000, 50=2.46000, 100=2.45000, 1000=2.45000, 10000=1.45000 (USD)", Radiation Hardening=No, REACH SVHC="No SVHC", RoHS=Yes, RoHS Compliant=Yes, Series=TL026, Stock 1=1672, Supplier 1=Mouser, Supplier 2=Farnell, Supplier 3=Digi-Key, Supplier Part Number 2=1459444, Supplier Part Number 3=296-11818-5-ND, Supply Current=27mA, Technology=JFET, Weight=0.002561oz, Width=3.91mm
U6: "OP-AMP, 1.2MHZ, 0.5V/ US, TSSOP-14", Amplifer Supply Voltage="± 1.5V to ± 16", Amplifier Case Style=TSSOP, Input Bias Current=250000, Manufacturer="TEXAS INSTRUMENTS", Operating Temperature Max=70, Operating Temperature Min=0, Operating Temperature Range="0°C to +70", Output Current=20, Quiescent Current=0.3, Supplier Part Number 1=595-LM324PWR, Supply Voltage Max=32, Supply Voltage Min=3, Bandwidth=1.2, ComponentLink1Description=http://www.farnell.com/datasheets/1877076.pdf, ComponentLink1URL=http://www.farnell.com/datasheets/1877076.pdf, ComponentLink2Description=http://www.farnell.com/datasheets/378369.pdf, ComponentLink2URL=http://www.farnell.com/datasheets/378369.pdf, Filter Terminals=SMD, Manufacturer Part Number=LM324PWR, MSL="MSL 1 - Unlimited", No. of Amplifiers=4, No. of Pins=14, Op Amp Type="High Gain", Packaging="Cut Tape", Pricing 1="5=0,171, 50=0,15, 250=0,126, 500=0,125, 1000=0,125 (EUR)", Pricing 3="1=0,24, 10=0,23, 100=0,23, 250=0,22, 500=0,21, 1000=0,21, 3000=0,171, 10000=0,157 (EUR)", RoHS=YES, Slew Rate=0.5, Stock 1=1889, Stock 3=1204, Supplier 1=Mouser, Supplier 2=Farnell, Supplier Part Number 2=2342289, Supply Voltage Range="± 1.5V to ± 16", SVHC="No SVHC (17-Dec-2014)"

## Free pads (board coordinates)
  round 5 hole 3.2 mask+0.05: 0(5,55) 1(55,55) 2(5,5) 3(55,5)

## Via types
v1: diameter 0.7, hole 0.3, Top Layer to Bottom Layer, 268 vias
v2: diameter 0.54, hole 0.2, Top Layer to Bottom Layer, 36 vias

## Nets (pads, with @x,y where several pads share a name; then routed paths per layer and width w, separated by ;. In a path a pad name is that pad's centre, name@x,y a point inside that pad or via, vN(x,y) a via of type N, cw(c..) or ccw(c..) an arc to the next point about the centre after c; other vN are vias at no path point)
+5V: C5.2 C13.1 C15.2 C17.2 C19.2 J14.1 R4.2 R5.2 U3.7 U5.6 U6.4 | length 12.6
  Top Layer w0.5: v2(2.7,27.1) 2.7,27.111 2.775,27.186 C15.2@2.775,28.185 ; C15.2 C15.2@2.775,28.185 ; U5.6 2.825,28.135 C15.2@2.775,28.185 ; U6.4 v2(27.8,24.7) C19.2 ; v2(41.5,20.2) 41.5,20.211 41.525,20.236 C17.2 41.525,22.02 41.635,22.13 U3.7 ; R5.2 v2(41.8,33) ; R4.2 C5.2 v2(56.8,29.9)
-5V: C14.2 C16.2 C18.2 J14.3 U5.3 U6.11 | length 64.2
  Top Layer w0.089: v2(27.8,16) 27.8,16.288
  Top Layer w0.5: U5.3 10.55,28.135 10.615,28.2 C16.2 12.225,27.036 12.2,27.011 v2(12.2,27) ; C18.2 v2(27.8,16) ; 27.8,16.288 U6.11
  Bottom Layer w1: v2(12.2,27) 12.2,20.4 23,9.6 26.6,9.6 27.5,10.5 27.5,15.7 28.4,16.6 42.15,16.6 C14.2 45.75,9.871 47.5,8.121 J14.3
"FILTER OUT": C8.1 C10.2 J9.1 U4.6 | length 13.5
  Top Layer w0.2: U4.6 47.7,41.1 49.6,39.2 50.975,39.2 C10.2 54.775,39.225 J9.1 C8.1
GND: C5.1 C9.1 C10.1 C12.1 C13.2 C14.1 C15.1 C16.1 C17.1 C18.1 C19.1 J9.2 J10.2 J11.2 J12.2 J13.3 J14.2 pad.0 pad.1 pad.2 pad.3 R8.1 R9.1 R10.1 R11.1 R13.1 R15.2 R21.1 R26.1 U3.4 U3.8 U4.2 U4.3 U4.4 U4.5 U6.3 | length 19.7
  Top Layer w0.2: R13.1 v2(20.4,21.1) ; C12.1 19.875,22.725 20.535,22.065 20.535,21.965 v2(20.6,21.9)
  Top Layer w0.5: v2(1.2,27.2) 1.2,27.211 1.225,27.236 C15.1 ; v2(4.2,36.9) C9.1 ; R8.1 v2(6.775,24.325) ; R9.1 v2(8.225,24.325) ; C16.1 v2(14.6,28.2) ; v2(23,12.6) R21.1 ; v2(24.1,24.6) R15.2 ; C18.1 v2(28.625,13.325) ; C19.1 v2(27.8,27.9) ; v2(28.4,22) 28.4,22.011 28.45,22.061 U6.3 ; R26.1 v2(28.725,11.025) ; U3.4 39.097,28.497 39.097,27.003 v2(39.1,27) ; v2(42.9,24.9) 42.902,24.898 42.902,23.502 U3.8 ; C17.1 v2(44.2,21.2) ; R11.1 v2(43.4,32.9) ; C10.1 v2(51,41.6) ; v2(53.4,29.9) R10.1 ; C5.1 v2(56.8,33.4)
  other v1: 1,37 3,37 9,37 11,37 13,37 15,37 17,37 19,37 21,37 23,37 25,37 27,37 29,37 31,37 33,37 35,37 37,37 39,37 41,37 43,37 45,37 47,37 49,37 51,37 53,37 57,37 1,39 3,39 5,39 9,39 11,39 13,39 15,39 17,39 19,39 21,39 23,39 25,39 27,39 29,39 31,39 33,39 35,39 37,39 39,39 41,39 43,39 45,39 47,39 1,41 3,41 5,41 7,41 21,41 23,41 25,41 27,41 29,41 31,41 33,41 35,41 37,41 39,41 49,41 53,41 57,41 17,43 19,43 21,43 23,43 25,43 27,43 29,43 31,43 33,43 35,43 37,43 39,43 41,43 43,43 45,43 47,43 49,43 51,43 53,43 55,43 57,43 1,45 3,45 5,45 7,45 9,45 11,45 17,45 19,45 21,45 23,45 25,45 27,45 29,45 31,45 33,45 35,45 37,45 39,45 41,45 43,45 49,45 51,45 53,45 55,45 57,45 1,47 3,47 5,47 7,47 9,47 11,47 13,47 15,47 17,47 19,47 21,47 23,47 25,47 27,47 29,47 31,47 33,47 35,47 37,47 39,47 41,47 43,47 45,47 47,47 49,47 51,47 53,47 55,47 57,47 1,49 3,49 5,49 7,49 9,49 11,49 13,49 15,49 17,49 19,49 21,49 23,49 25,49 27,49 29,49 31,49 33,49 35,49 37,49 39,49 41,49 43,49 45,49 47,49 49,49 51,49 53,49 55,49 57,49 1,51 3,51 5,51 7,51 9,51 11,51 13,51 15,51 17,51 19,51 21,51 23,51 25,51 27,51 29,51 31,51 33,51 35,51 37,51 39,51 41,51 43,51 45,51 47,51 49,51 51,51 53,51 55,51 57,51 1,53 9,53 11,53 13,53 15,53 17,53 19,53 21,53 23,53 25,53 27,53 29,53 31,53 33,53 35,53 37,53 39,53 41,53 43,53 45,53 47,53 49,53 51,53 1,55 9,55 11,55 13,55 15,55 17,55 19,55 21,55 23,55 25,55 27,55 29,55 31,55 33,55 35,55 37,55 39,55 41,55 43,55 45,55 47,55 49,55 51,55 1,57 9,57 11,57 13,57 15,57 17,57 19,57 21,57 23,57 25,57 27,57 29,57 31,57 33,57 35,57 37,57 39,57 41,57 43,57 45,57 47,57 49,57 51,57
NetC1_1: C1.1 R17.2 R20.1 U6.1 | length 20.2
  Top Layer w0.2: v2(25,11.4) 25,10.917 25.292,10.625 R20.1 ; v2(29.7,19.7) 29.725,19.725 29.725,23.275 U6.1 29.75,23.907 30.1,24.257 30.1,24.625 30.625,25.15 30.625,25.325 30.825,25.525 R17.2 C1.1
  Bottom Layer w0.2: v2(25,11.4) 25,15 v2(29.7,19.7)
NetC1_2: C1.2 R17.1 R19.2 U6.2 | length 6.5
  Top Layer w0.2: U6.2 29.1,24.5 29.3,24.7 29.3,25.425 29.475,25.425 29.775,25.725 29.775,26.025 30.825,27.075 R17.1 C1.2
NetC6_1: C6.1 J11.1 | length 6.1
  Top Layer w0.2: C6.1 7.275,19.625 7.5,19.4 J11.1
NetC6_2: C6.2 R8.2 U5.8 | length 4.9
  Top Layer w0.2: U5.8 5,24.5 5.116,24.384 5.116,23.61 R8.2 5.225,22.475 5.725,21.975 C6.2
NetC7_1: C7.1 U5.5 | length 1.5
  Top Layer w0.2: U5.5 C7.1
NetC7_2: C7.2 R6.2 R7.2 | length 3
  Top Layer w0.2: C7.2 R7.2 R6.2
NetC8_2: C8.2 R4.1 R10.2 U3.3 | length 21.2
  Top Layer w0.2: U3.3 40.365,32.765 41.3,33.7 45.8,33.7 47.125,32.375 R10.2 R4.1 C8.2
NetC9_2: C9.2 R6.1 R7.1 U4.1 | length 13.2
  Top Layer w0.2: R7.1 R6.1 6.6,36.875 C9.2 6.575,38.575 9.1,41.1 U4.1
NetC11_1: C11.1 U5.4 | length 2.4
  Top Layer w0.2: U5.4 11.105,29.405 11.6,29.9 C11.1
NetC11_2: C11.2 D1.2 R12.1 | length 8.3
  Top Layer w0.2: C11.2 15.7,29.9 17.4,28.2 D1.2 17.4,24.375 R12.1
NetJ10_1: J10.1 R1.2 | length 5.9
  Top Layer w0.2: R1.2 J10.1
NetJ12_1: J12.1 R12.2 R13.2 | length 18.2
  Top Layer w0.2: J12.1 17,14.1 17.825,14.925 R13.2 17.825,21.275 17.5,21.6 R12.2
NetJ13_2: J13.2 R14.1 U6.7 | length 11.5
  Top Layer w0.2: v2(25,24.3) 25.092,24.3 25.417,24.625 25.775,24.625 ; R14.1 25.7,24.7 25.775,24.625 ; U6.7 25.85,24.55 25.775,24.625
  Bottom Layer w0.2: v2(25,24.3) 25,26.4 27.7,29.1 J13.2
NetR1_1: R1.1 U3.6 | length 11.2
  Top Layer w0.2: U3.6 40.365,19.935 40.9,19.4 44.6,19.4 45.2,20 R1.1
NetR5_1: R5.1 R11.2 U3.2 | length 3.7
  Top Layer w0.2: U3.2 41.635,30.36 R5.1 R11.2
NetR9_2: R9.2 U5.1 | length 2.2
  Top Layer w0.2: R9.2 9.775,24.575 9.8,24.6 9.8,25.399 9.996,25.595 U5.1
NetR14_2: R14.2 R15.1 U6.6 | length 6.3
  Top Layer w0.2: R15.1 R14.2 26.583,26.975 26.7,26.858 26.7,25 26.5,24.8 U6.6
NetR16_1: R16.1 R21.2 U6.10 | length 9.3
  Top Layer w0.2: R21.2 R16.1 24.6,16.018 24.476,16.142 24.476,18.576 25,19.1 26.8,19.1 27.15,18.75 U6.10
NetR18_1: R18.1 R20.2 U6.9 | length 6.2
  Top Layer w0.2: R20.2 R18.1 26.2,13.983 26.317,14.1 26.524,14.1 26.975,14.551 26.975,16.125 26.5,16.6 U6.9
NetR22_1: R22.1 R23.2 U6.13 | length 10.9
  Top Layer w0.2: U6.13 29.1,16.3 32.825,12.575 R22.1 32.825,10.025 32.5,9.7 R23.2
NetR22_2: R22.2 R24.1 U6.14 | length 11.3
  Top Layer w0.2: U6.14 29.75,16.55 34.375,11.925 R22.2 34.375,8.75 34.675,8.45 R24.1
NetR25_2: R25.2 R26.2 U6.12 | length 10
  Top Layer w0.2: U6.12 28.45,15.65 30.275,13.825 R26.2 30.3,10.175 R25.2
VAGC: J13.1 R18.2 U5.2 U6.8 | length 35.4
  Top Layer w0.2: U5.2 11.235,26.865 13.267,24.833 14.067,24.833 v2(15.8,23.1) ; v2(25.1,16.4) 25.85,16.4 ; U6.8 25.85,16.4 ; R18.2 26.2,15.9 25.85,16.25 25.85,16.4
  Bottom Layer w0.2: v2(15.8,23.1) 23.3,23.1 ; v2(25.1,16.4) 25.1,21.7 23.7,23.1 23.3,23.1 ; J13.1 25,31.44 25,28.6 23.3,26.9 23.3,23.1
VC: C12.2 D1.1 R19.1 U6.5 | length 20.7
  Top Layer w0.2: D1.1 19.6,24.375 C12.2 21.125,24.275 24.1,21.3 26.9,21.3 v2(27.15,21.55) U6.5 ; R19.1 v2(29.4,28)
  Bottom Layer w0.2: v2(27.15,21.55) 27.776,22.176 27.776,22.258 29.4,23.882 v2(29.4,28)
VREF: R16.2 U5.7 | length 31.6
  Top Layer w0.2: U5.7 6.443,26.865 6.608,26.7 v2(6.7,26.7) ; v2(23.8,11.9) 24.6,12.7 R16.2
  Bottom Layer w0.2: v2(6.7,26.7) 9,26.7 10.5,28.2 12.7,28.2 13.9,27 13.9,22.6 22.4,14.1 23.2,14.1 23.8,13.5 v2(23.8,11.9)
pads on no net: R23.1 R24.2 R25.1 U3.1 U3.5

## Polygon pours and split planes (outlines as drawn)
GND on Layer 1 "GND_L02_P000" (solid, remove dead copper, pour order 0): 1,0.1 cw(c1,1) 0.1,1 0.1,59 cw(c1,59) 1,59.9 59,59.9 cw(c59,59) 59.9,59 59.9,1 cw(c59,1) 59,0.1
GND on Layer 2 "GND_L03_P005" (solid, remove dead copper, pour order 5): 59.9,34.7 59.9,59 ccw(c59,59) 59,59.9 1,59.9 ccw(c1,59) 0.1,59 0.1,34.7
+5V on Layer 2 "+5V_L03_P001" (solid, remove dead copper, pour order 1): 1,0.1 cw(c1,1) 0.1,1 0.1,34.7 59.9,34.7 59.9,1 cw(c59,1) 59,0.1
GND on Bottom Layer "GND_L04_P002" (solid, remove dead copper, pour order 2): 21.5,0.1 1,0.1 cw(c1,1) 0.1,1 0.1,59 cw(c1,59) 1,59.9 59,59.9 cw(c59,59) 59.9,59 59.9,1.005 cw(c58.992,1.005) 58.992,0.097
GND on Top Layer "GND_L01_P004" (solid, remove dead copper, pour order 4): 59,0.1 ccw(c59,1) 59.9,1 59.9,28 36.54,28 ccw(c36.54,25.46) 34,25.46 34,0.1
GND on Top Layer "GND_L01_P003" (solid, remove dead copper, pour order 3): 0.1,59 cw(c1,59) 1,59.9 59,59.9 cw(c59,59) 59.9,59 59.9,40.5 50.4,40.5 48.4,42.5 44,42.5 44,34.5 16,34.5 16,43 0.1,43

## Silkscreen, mask and mechanical layers (free items; w line width, h text height)
Top Overlay:
  text "2021.11.27" at 41.5,58 h1
  text "AGC TESR BOARD" at 10.9,56.7 h2
  text "GND" at 53.2,45.2 h1
  text "FILTER OUT" at 50,43.2 h1
  text "V AGC" at 20,29.5 h1 r90
  text "V DET" at 21.5,29.5 h1 r90
  text "GND" at 23,29.5 h1 r90
  text "INPUT" at 14,12.5 h1 r90
  text "FILTERED LIMITED OUT" at 51.5,10 h1
  text "+5V GND -5V" at 38.5,4.5 h1
  text "AGC OUT" at 23.5,1.5 h1 r90
  text "+5V GND -5V" at 37.5,0.5 h1 r90
Mechanical 1:
  lines w0.2: 0,1 ccw(c1,1) 1,0 39,0 59,0 ccw(c59,1) 60,1 60,59 ccw(c59,59) 59,60 1,60 ccw(c1,59) 0,59 0,1

## Text inside footprints (layer, text, board x,y; h text height)
C13: Top Overlay "+" at 42.2,12.6 h1
C14: Top Overlay "+" at 49.2,12.6 h1